# EAGLE board SparkFun_Temperature_Sensor-STTS22H-Panel (EAGLE 9.6.2), part 1 of 4
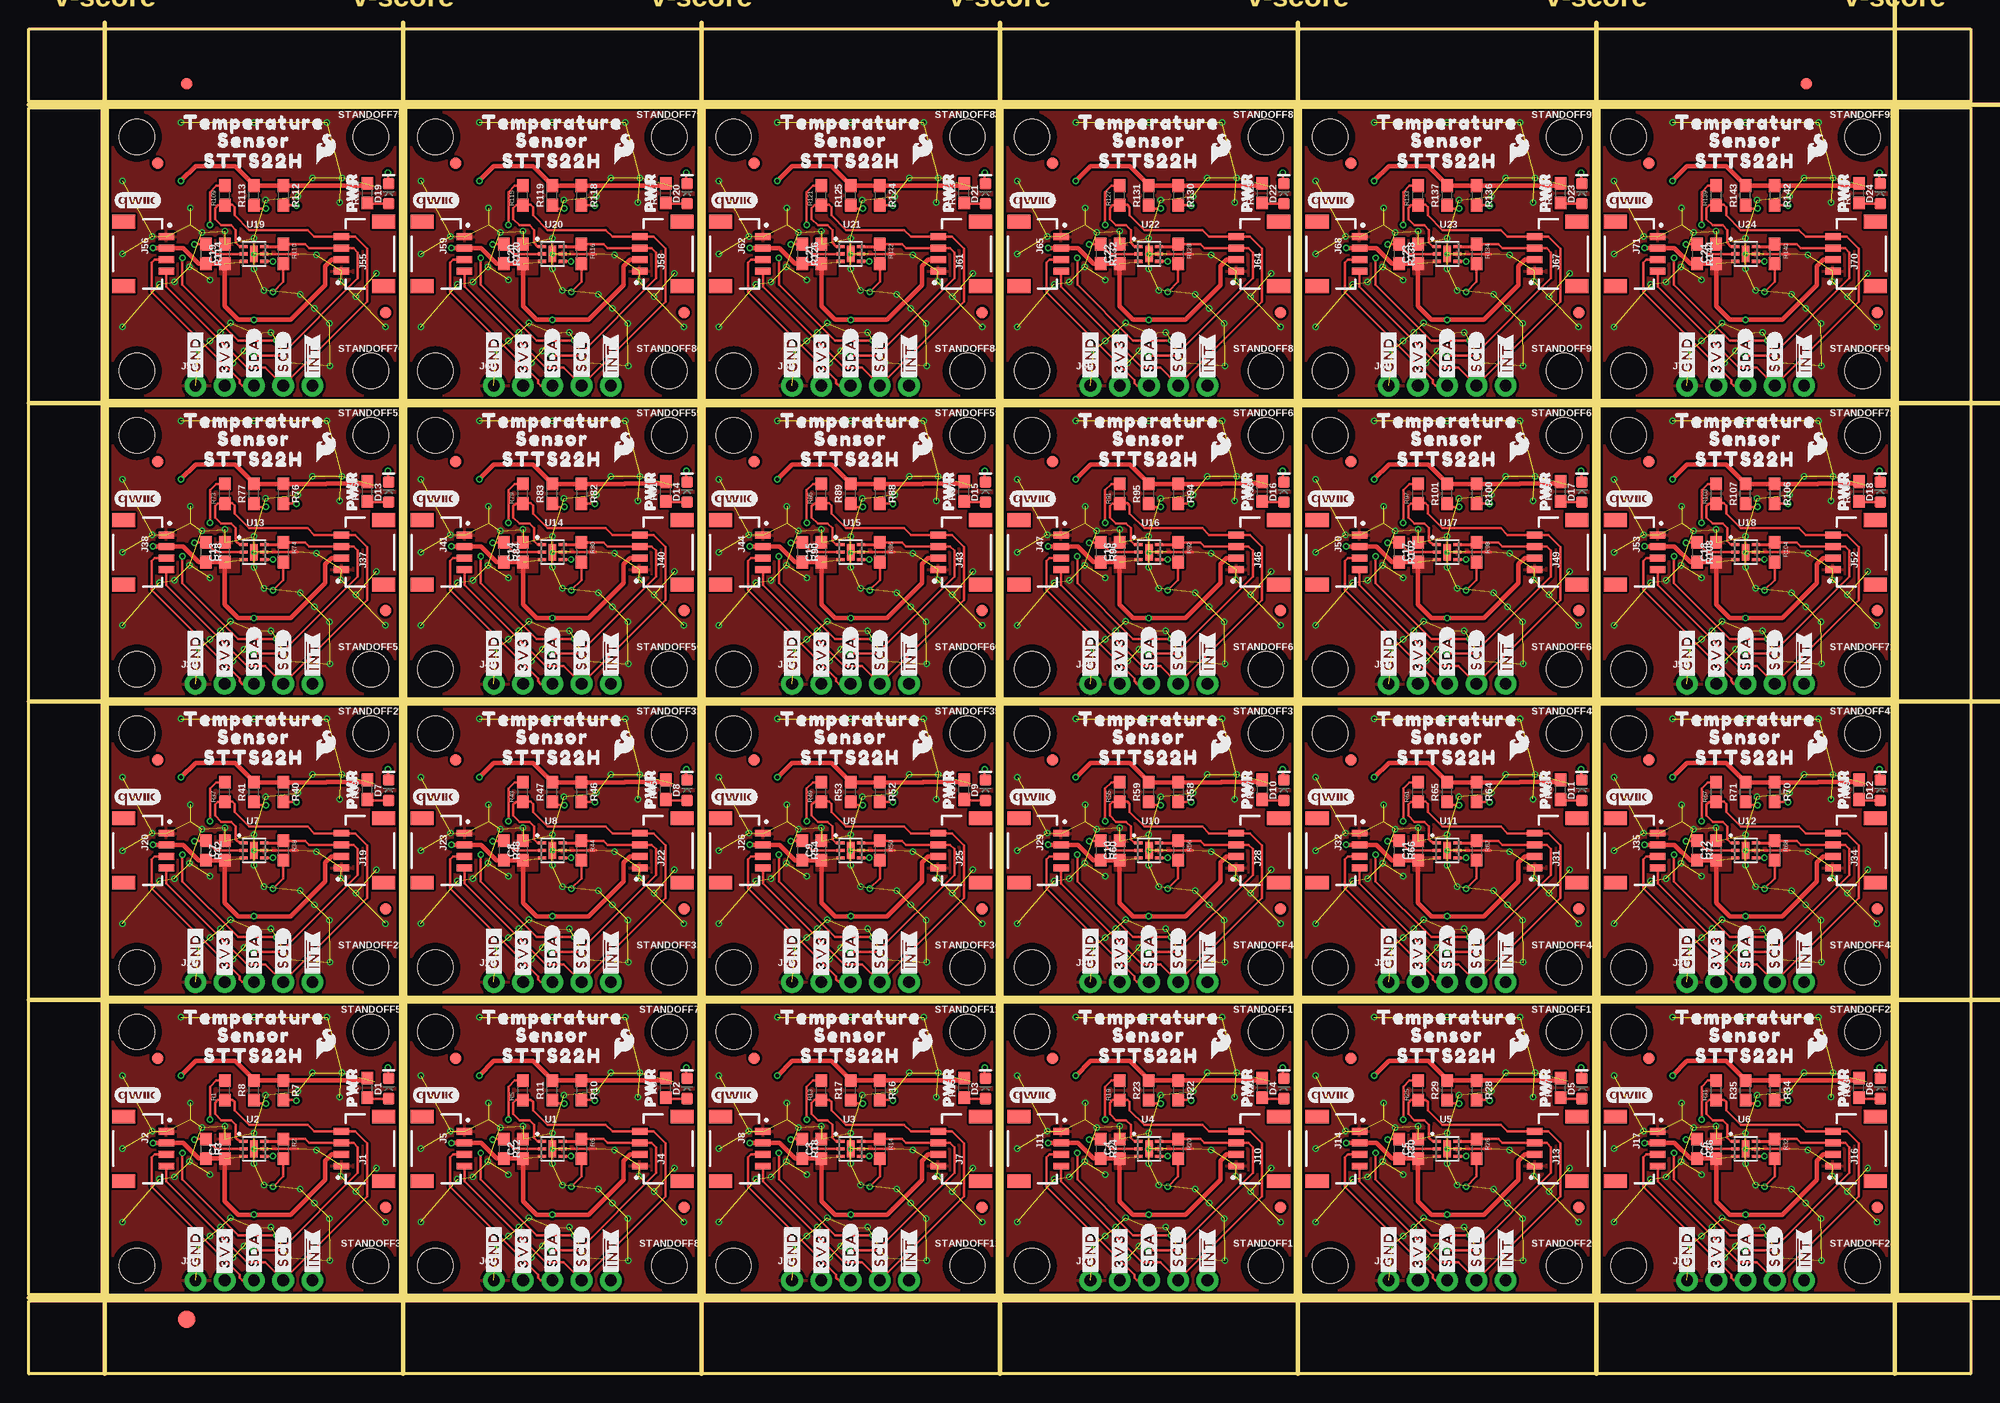
[diagram p0: board, top side]
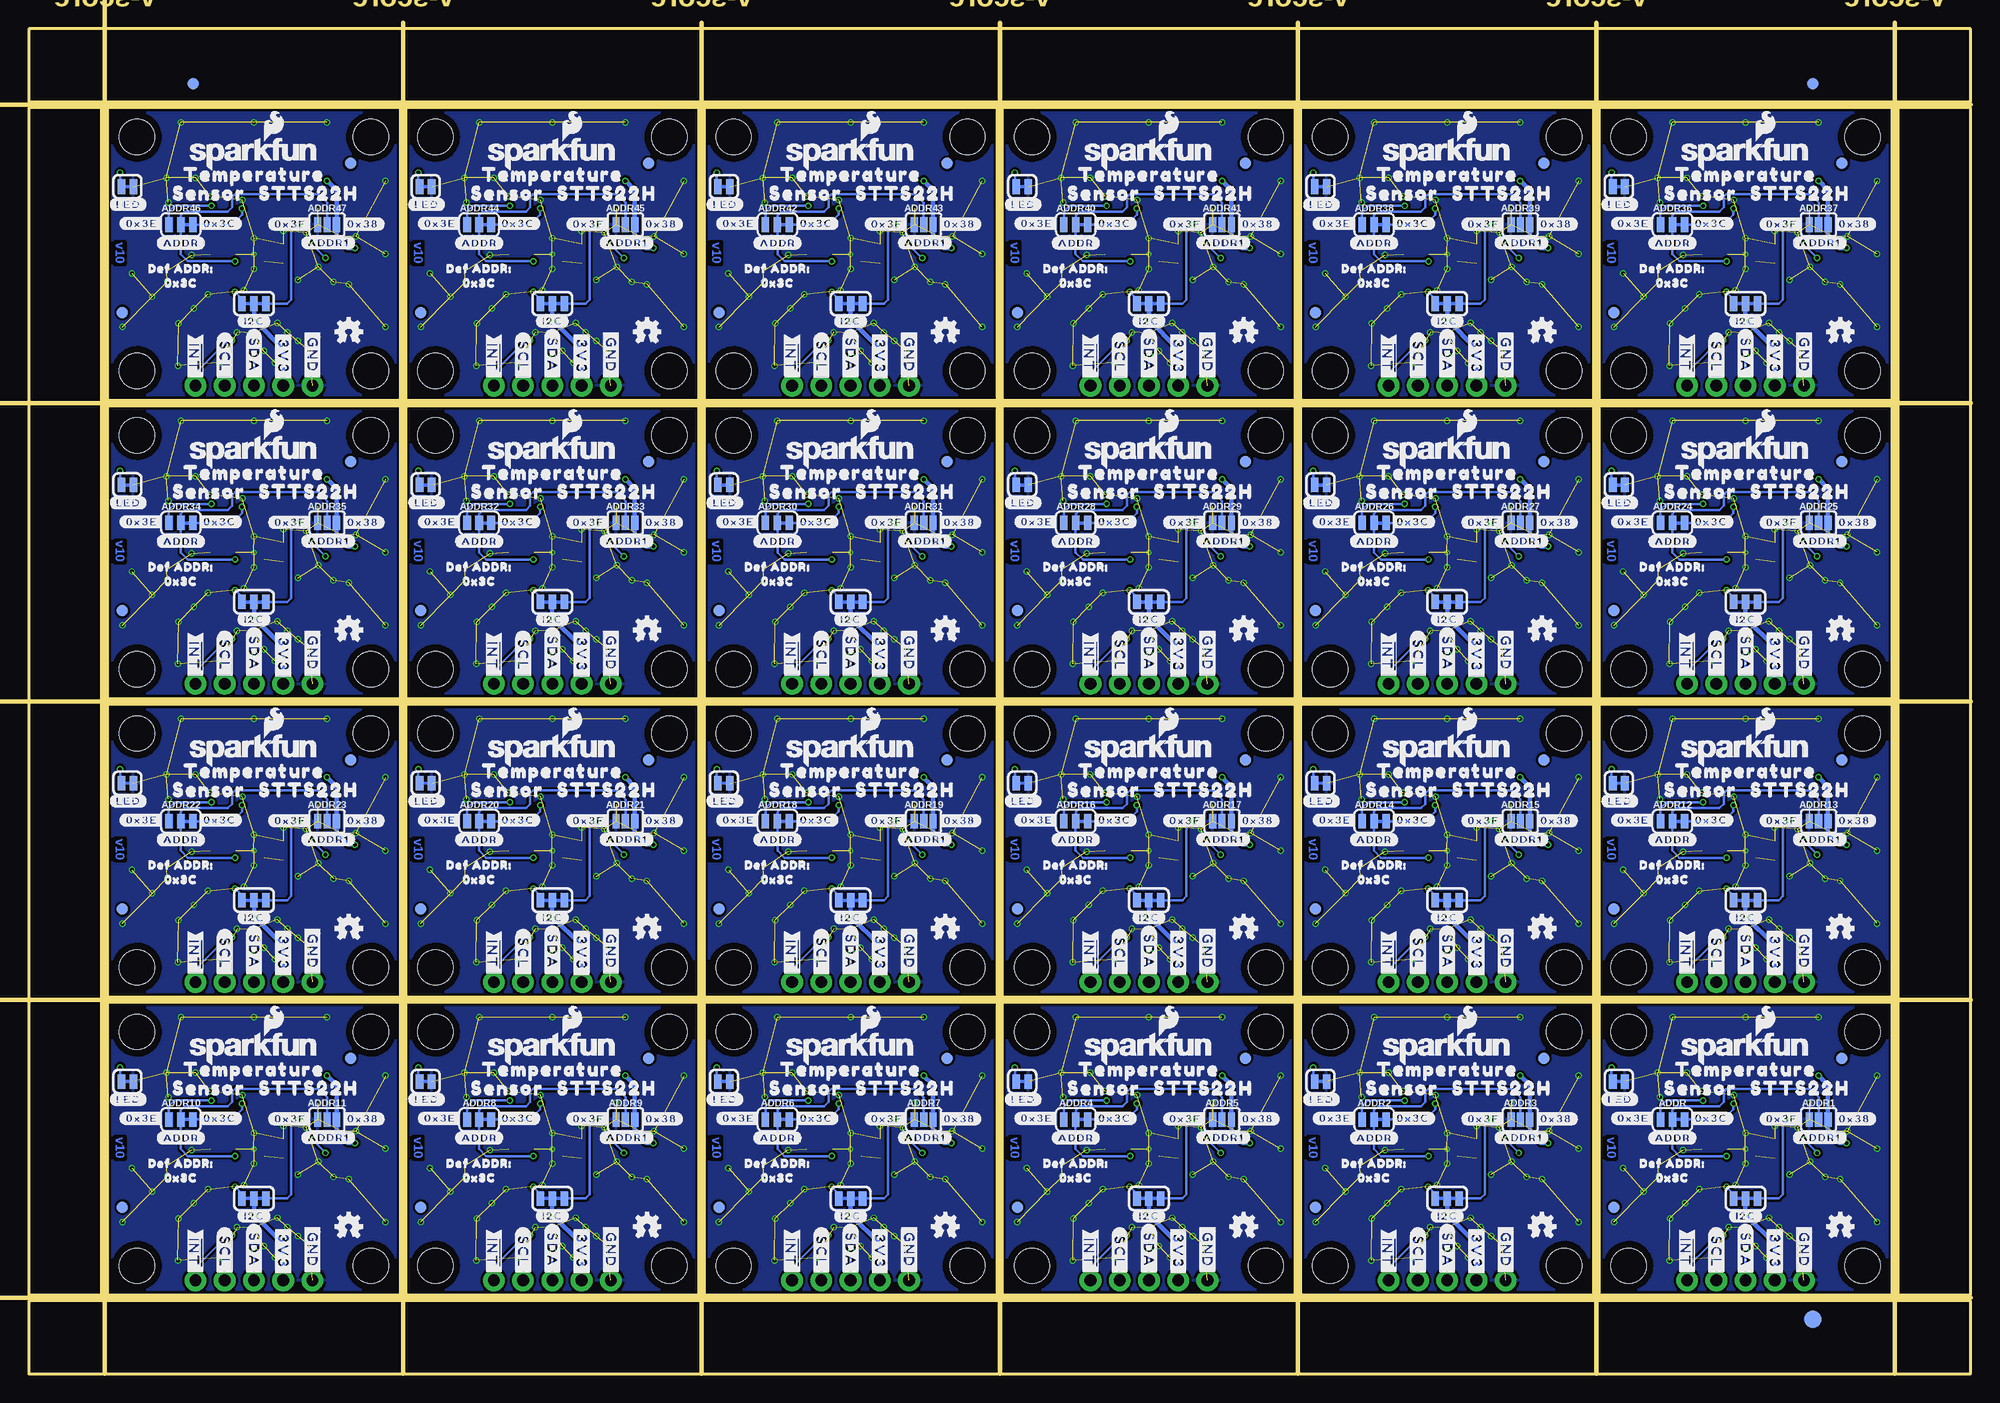
[diagram p1: board, bottom side, seen from below]

Size 168.66 x 116.84 mm. Coordinates in mm from the lower left corner, seen from the top.
Outline: 32.26,32.26 6.86,32.26 6.86,6.86 32.26,6.86 32.26,32.26
Outline: 58.17,32.26 32.77,32.26 32.77,6.86 58.17,6.86 58.17,32.26
Outline: 84.07,32.26 58.67,32.26 58.67,6.86 84.07,6.86 84.07,32.26
Outline: 109.98,32.26 84.58,32.26 84.58,6.86 109.98,6.86 109.98,32.26
Outline: 135.89,32.26 110.49,32.26 110.49,6.86 135.89,6.86 135.89,32.26
Outline: 161.8,32.26 136.4,32.26 136.4,6.86 161.8,6.86 161.8,32.26
Outline: 32.26,58.17 6.86,58.17 6.86,32.77 32.26,32.77 32.26,58.17
Outline: 58.17,58.17 32.77,58.17 32.77,32.77 58.17,32.77 58.17,58.17
Outline: 84.07,58.17 58.67,58.17 58.67,32.77 84.07,32.77 84.07,58.17
Outline: 109.98,58.17 84.58,58.17 84.58,32.77 109.98,32.77 109.98,58.17
Outline: 135.89,58.17 110.49,58.17 110.49,32.77 135.89,32.77 135.89,58.17
Outline: 161.8,58.17 136.4,58.17 136.4,32.77 161.8,32.77 161.8,58.17
Outline: 32.26,84.07 6.86,84.07 6.86,58.67 32.26,58.67 32.26,84.07
Outline: 58.17,84.07 32.77,84.07 32.77,58.67 58.17,58.67 58.17,84.07
Outline: 84.07,84.07 58.67,84.07 58.67,58.67 84.07,58.67 84.07,84.07
Outline: 109.98,84.07 84.58,84.07 84.58,58.67 109.98,58.67 109.98,84.07
Outline: 135.89,84.07 110.49,84.07 110.49,58.67 135.89,58.67 135.89,84.07
Outline: 161.8,84.07 136.4,84.07 136.4,58.67 161.8,58.67 161.8,84.07
Outline: 32.26,109.98 6.86,109.98 6.86,84.58 32.26,84.58 32.26,109.98
Outline: 58.17,109.98 32.77,109.98 32.77,84.58 58.17,84.58 58.17,109.98
Outline: 84.07,109.98 58.67,109.98 58.67,84.58 84.07,84.58 84.07,109.98
Outline: 109.98,109.98 84.58,109.98 84.58,84.58 109.98,84.58 109.98,109.98
Outline: 135.89,109.98 110.49,109.98 110.49,84.58 135.89,84.58 135.89,109.98
Outline: 161.8,109.98 136.4,109.98 136.4,84.58 161.8,84.58 161.8,109.98
Outline: 0,6.35 168.66,6.35 168.66,0 0,0 0,6.35
Outline: 162.31,109.98 168.66,109.98 168.66,6.86 162.31,6.86 162.31,109.98
Outline: 0,116.84 168.66,116.84 168.66,110.49 0,110.49 0,116.84
Outline: 0,109.98 6.35,109.98 6.35,6.86 0,6.86 0,109.98
Copper layers (1*16): Top 0.035mm / dielectric 1.5mm / Bottom 0.035mm
Design rules "SparkFun_Temperature_Sensor-STTS22H": minimum track width 5mil, minimum drill 0.3mm, track to track 5mil, track to pad 5mil, pad to pad 5mil, via to via 5mil, smd to smd 5mil, copper to edge 7mil, drill to drill 7mil, minimum pad ring 5mil, minimum via ring 5mil, stop-mask expansion 2.5mil, vias tented up to drill 25mil, thermal gap 10mil
Milling: 12 lines

## Footprints (pad centres in the part's own frame; a part is rotated, then mirrored left to right if it is on the bottom)
SMT-JUMPER_3_1-NC_TRACE_SILK = smd 0.66 x 1.27: 1 -1.041,0; 2 0,0; 3 1.041,0
SMT-JUMPER_3_NO_SILK = smd 0.635 x 1.27: 1 -0.813,0; 2 0,0; 3 0.813,0
0603 = smd 1.1 x 1: 1 -0.85,0; 2 0.85,0
LED-0603 = smd 1 x 1: A -0.877,0; C 0.877,0
FIDUCIAL-1X2 = smd 1 x 1: 1 0,0
FIDUCIAL-1.5X3 = smd 1.5 x 1.5: 1 0,0
SMT-JUMPER_3_2-NC_TRACE_SILK = smd 0.66 x 1.27: 1 -1.041,0; 2 0,0; 3 1.041,0
JST04_1MM_RA = smd 0.6 x 1.35: 1 -1.5,0; 2 -0.5,0; 3 0.5,0; 4 1.5,0 | smd 1.2 x 2: NC1 2.8,-3.675; NC2 -2.8,-3.675
1X05_NO_SILK = drill 1.016 pad 1.88: 1 0,0; 2 2.54,0; 3 5.08,0; 4 7.62,0; 5 10.16,0
SMT-JUMPER_2_NC_TRACE_SILK = smd 0.66 x 1.27: 1 -0.521,0; 2 0.521,0
STAND-OFF-TIGHT = hole 3.048: 0,0
UDFN-6L = smd 0.7 x 0.27: P1 -0.89,0.65; P2 -0.89,0; P3 -0.89,-0.65; P4 0.89,-0.65; P5 0.89,0; P6 0.89,0.65 | smd 0.65 x 1.45: P7 0.01,0

## Placement (x,y rotation side)
ADDR  JUMPER-SMT_3_1-NC_TRACE_SILK  [SMT-JUMPER_3_1-NC_TRACE_SILK]  25.91,22.1 0 bottom
ADDR1  JUMPER-SMT_3_NO_SILK  [SMT-JUMPER_3_NO_SILK]  13.21,22.1 0 bottom
ADDR2  JUMPER-SMT_3_1-NC_TRACE_SILK  [SMT-JUMPER_3_1-NC_TRACE_SILK]  51.82,22.1 0 bottom
ADDR3  JUMPER-SMT_3_NO_SILK  [SMT-JUMPER_3_NO_SILK]  39.12,22.1 0 bottom
ADDR4  JUMPER-SMT_3_1-NC_TRACE_SILK  [SMT-JUMPER_3_1-NC_TRACE_SILK]  77.72,22.1 0 bottom
ADDR5  JUMPER-SMT_3_NO_SILK  [SMT-JUMPER_3_NO_SILK]  65.02,22.1 0 bottom
ADDR6  JUMPER-SMT_3_1-NC_TRACE_SILK  [SMT-JUMPER_3_1-NC_TRACE_SILK]  103.63,22.1 0 bottom
ADDR7  JUMPER-SMT_3_NO_SILK  [SMT-JUMPER_3_NO_SILK]  90.93,22.1 0 bottom
ADDR8  JUMPER-SMT_3_1-NC_TRACE_SILK  [SMT-JUMPER_3_1-NC_TRACE_SILK]  129.54,22.1 0 bottom
ADDR9  JUMPER-SMT_3_NO_SILK  [SMT-JUMPER_3_NO_SILK]  116.84,22.1 0 bottom
ADDR10  JUMPER-SMT_3_1-NC_TRACE_SILK  [SMT-JUMPER_3_1-NC_TRACE_SILK]  155.45,22.1 0 bottom
ADDR11  JUMPER-SMT_3_NO_SILK  [SMT-JUMPER_3_NO_SILK]  142.75,22.1 0 bottom
ADDR12  JUMPER-SMT_3_1-NC_TRACE_SILK  [SMT-JUMPER_3_1-NC_TRACE_SILK]  25.91,48.01 0 bottom
ADDR13  JUMPER-SMT_3_NO_SILK  [SMT-JUMPER_3_NO_SILK]  13.21,48.01 0 bottom
ADDR14  JUMPER-SMT_3_1-NC_TRACE_SILK  [SMT-JUMPER_3_1-NC_TRACE_SILK]  51.82,48.01 0 bottom
ADDR15  JUMPER-SMT_3_NO_SILK  [SMT-JUMPER_3_NO_SILK]  39.12,48.01 0 bottom
ADDR16  JUMPER-SMT_3_1-NC_TRACE_SILK  [SMT-JUMPER_3_1-NC_TRACE_SILK]  77.72,48.01 0 bottom
ADDR17  JUMPER-SMT_3_NO_SILK  [SMT-JUMPER_3_NO_SILK]  65.02,48.01 0 bottom
ADDR18  JUMPER-SMT_3_1-NC_TRACE_SILK  [SMT-JUMPER_3_1-NC_TRACE_SILK]  103.63,48.01 0 bottom
ADDR19  JUMPER-SMT_3_NO_SILK  [SMT-JUMPER_3_NO_SILK]  90.93,48.01 0 bottom
ADDR20  JUMPER-SMT_3_1-NC_TRACE_SILK  [SMT-JUMPER_3_1-NC_TRACE_SILK]  129.54,48.01 0 bottom
ADDR21  JUMPER-SMT_3_NO_SILK  [SMT-JUMPER_3_NO_SILK]  116.84,48.01 0 bottom
ADDR22  JUMPER-SMT_3_1-NC_TRACE_SILK  [SMT-JUMPER_3_1-NC_TRACE_SILK]  155.45,48.01 0 bottom
ADDR23  JUMPER-SMT_3_NO_SILK  [SMT-JUMPER_3_NO_SILK]  142.75,48.01 0 bottom
ADDR24  JUMPER-SMT_3_1-NC_TRACE_SILK  [SMT-JUMPER_3_1-NC_TRACE_SILK]  25.91,73.91 0 bottom
ADDR25  JUMPER-SMT_3_NO_SILK  [SMT-JUMPER_3_NO_SILK]  13.21,73.91 0 bottom
ADDR26  JUMPER-SMT_3_1-NC_TRACE_SILK  [SMT-JUMPER_3_1-NC_TRACE_SILK]  51.82,73.91 0 bottom
ADDR27  JUMPER-SMT_3_NO_SILK  [SMT-JUMPER_3_NO_SILK]  39.12,73.91 0 bottom
ADDR28  JUMPER-SMT_3_1-NC_TRACE_SILK  [SMT-JUMPER_3_1-NC_TRACE_SILK]  77.72,73.91 0 bottom
ADDR29  JUMPER-SMT_3_NO_SILK  [SMT-JUMPER_3_NO_SILK]  65.02,73.91 0 bottom
ADDR30  JUMPER-SMT_3_1-NC_TRACE_SILK  [SMT-JUMPER_3_1-NC_TRACE_SILK]  103.63,73.91 0 bottom
ADDR31  JUMPER-SMT_3_NO_SILK  [SMT-JUMPER_3_NO_SILK]  90.93,73.91 0 bottom
ADDR32  JUMPER-SMT_3_1-NC_TRACE_SILK  [SMT-JUMPER_3_1-NC_TRACE_SILK]  129.54,73.91 0 bottom
ADDR33  JUMPER-SMT_3_NO_SILK  [SMT-JUMPER_3_NO_SILK]  116.84,73.91 0 bottom
ADDR34  JUMPER-SMT_3_1-NC_TRACE_SILK  [SMT-JUMPER_3_1-NC_TRACE_SILK]  155.45,73.91 0 bottom
ADDR35  JUMPER-SMT_3_NO_SILK  [SMT-JUMPER_3_NO_SILK]  142.75,73.91 0 bottom
ADDR36  JUMPER-SMT_3_1-NC_TRACE_SILK  [SMT-JUMPER_3_1-NC_TRACE_SILK]  25.91,99.82 0 bottom
ADDR37  JUMPER-SMT_3_NO_SILK  [SMT-JUMPER_3_NO_SILK]  13.21,99.82 0 bottom
ADDR38  JUMPER-SMT_3_1-NC_TRACE_SILK  [SMT-JUMPER_3_1-NC_TRACE_SILK]  51.82,99.82 0 bottom
ADDR39  JUMPER-SMT_3_NO_SILK  [SMT-JUMPER_3_NO_SILK]  39.12,99.82 0 bottom
ADDR40  JUMPER-SMT_3_1-NC_TRACE_SILK  [SMT-JUMPER_3_1-NC_TRACE_SILK]  77.72,99.82 0 bottom
ADDR41  JUMPER-SMT_3_NO_SILK  [SMT-JUMPER_3_NO_SILK]  65.02,99.82 0 bottom
ADDR42  JUMPER-SMT_3_1-NC_TRACE_SILK  [SMT-JUMPER_3_1-NC_TRACE_SILK]  103.63,99.82 0 bottom
ADDR43  JUMPER-SMT_3_NO_SILK  [SMT-JUMPER_3_NO_SILK]  90.93,99.82 0 bottom
ADDR44  JUMPER-SMT_3_1-NC_TRACE_SILK  [SMT-JUMPER_3_1-NC_TRACE_SILK]  129.54,99.82 0 bottom
ADDR45  JUMPER-SMT_3_NO_SILK  [SMT-JUMPER_3_NO_SILK]  116.84,99.82 0 bottom
ADDR46  JUMPER-SMT_3_1-NC_TRACE_SILK  [SMT-JUMPER_3_1-NC_TRACE_SILK]  155.45,99.82 0 bottom
ADDR47  JUMPER-SMT_3_NO_SILK  [SMT-JUMPER_3_NO_SILK]  142.75,99.82 0 bottom
C1  0.1uF  [0603]  17.02,19.56 90 top
C2  0.1uF  [0603]  42.93,19.56 90 top
C3  0.1uF  [0603]  68.83,19.56 90 top
C4  0.1uF  [0603]  94.74,19.56 90 top
C5  0.1uF  [0603]  120.65,19.56 90 top
C6  0.1uF  [0603]  146.56,19.56 90 top
C7  0.1uF  [0603]  17.02,45.47 90 top
C8  0.1uF  [0603]  42.93,45.47 90 top
C9  0.1uF  [0603]  68.83,45.47 90 top
C10  0.1uF  [0603]  94.74,45.47 90 top
C11  0.1uF  [0603]  120.65,45.47 90 top
C12  0.1uF  [0603]  146.56,45.47 90 top
C13  0.1uF  [0603]  17.02,71.37 90 top
C14  0.1uF  [0603]  42.93,71.37 90 top
C15  0.1uF  [0603]  68.83,71.37 90 top
C16  0.1uF  [0603]  94.74,71.37 90 top
C17  0.1uF  [0603]  120.65,71.37 90 top
C18  0.1uF  [0603]  146.56,71.37 90 top
C19  0.1uF  [0603]  17.02,97.28 90 top
C20  0.1uF  [0603]  42.93,97.28 90 top
C21  0.1uF  [0603]  68.83,97.28 90 top
C22  0.1uF  [0603]  94.74,97.28 90 top
C23  0.1uF  [0603]  120.65,97.28 90 top
C24  0.1uF  [0603]  146.56,97.28 90 top
D1  RED  [LED-0603]  31.27,24.79 90 top
D2  RED  [LED-0603]  57.18,24.79 90 top
D3  RED  [LED-0603]  83.08,24.79 90 top
D4  RED  [LED-0603]  108.99,24.79 90 top
D5  RED  [LED-0603]  134.9,24.79 90 top
D6  RED  [LED-0603]  160.81,24.79 90 top
D7  RED  [LED-0603]  31.27,50.7 90 top
D8  RED  [LED-0603]  57.18,50.7 90 top
D9  RED  [LED-0603]  83.08,50.7 90 top
D10  RED  [LED-0603]  108.99,50.7 90 top
D11  RED  [LED-0603]  134.9,50.7 90 top
D12  RED  [LED-0603]  160.81,50.7 90 top
D13  RED  [LED-0603]  31.27,76.61 90 top
D14  RED  [LED-0603]  57.18,76.61 90 top
D15  RED  [LED-0603]  83.08,76.61 90 top
D16  RED  [LED-0603]  108.99,76.61 90 top
D17  RED  [LED-0603]  134.9,76.61 90 top
D18  RED  [LED-0603]  160.81,76.61 90 top
D19  RED  [LED-0603]  31.27,102.51 90 top
D20  RED  [LED-0603]  57.18,102.51 90 top
D21  RED  [LED-0603]  83.08,102.51 90 top
D22  RED  [LED-0603]  108.99,102.51 90 top
D23  RED  [LED-0603]  134.9,102.51 90 top
D24  RED  [LED-0603]  160.81,102.51 90 top
E$1  [FIDUCIAL-1X2]  13.72,112.08 0 top
E$2  [FIDUCIAL-1X2]  13.72,112.08 0 bottom
E$3  [FIDUCIAL-1X2]  154.37,112.08 0 top
E$4  [FIDUCIAL-1X2]  154.37,112.08 0 bottom
E$5  [FIDUCIAL-1.5X3]  13.72,4.76 0 top
E$6  [FIDUCIAL-1.5X3]  13.72,4.76 0 bottom
FD1  FIDUCIAL1X2  [FIDUCIAL-1X2]  11.18,27.43 0 bottom
FD2  FIDUCIAL1X2  [FIDUCIAL-1X2]  30.99,14.48 0 bottom
FD3  FIDUCIAL1X2  [FIDUCIAL-1X2]  11.18,27.43 0 top
FD4  FIDUCIAL1X2  [FIDUCIAL-1X2]  30.99,14.48 0 top
FD5  FIDUCIAL1X2  [FIDUCIAL-1X2]  37.08,27.43 0 bottom
FD6  FIDUCIAL1X2  [FIDUCIAL-1X2]  56.9,14.48 0 bottom
FD7  FIDUCIAL1X2  [FIDUCIAL-1X2]  37.08,27.43 0 top
FD8  FIDUCIAL1X2  [FIDUCIAL-1X2]  56.9,14.48 0 top
FD9  FIDUCIAL1X2  [FIDUCIAL-1X2]  62.99,27.43 0 bottom
FD10  FIDUCIAL1X2  [FIDUCIAL-1X2]  82.8,14.48 0 bottom
FD11  FIDUCIAL1X2  [FIDUCIAL-1X2]  62.99,27.43 0 top
FD12  FIDUCIAL1X2  [FIDUCIAL-1X2]  82.8,14.48 0 top
FD13  FIDUCIAL1X2  [FIDUCIAL-1X2]  88.9,27.43 0 bottom
FD14  FIDUCIAL1X2  [FIDUCIAL-1X2]  108.71,14.48 0 bottom
FD15  FIDUCIAL1X2  [FIDUCIAL-1X2]  88.9,27.43 0 top
FD16  FIDUCIAL1X2  [FIDUCIAL-1X2]  108.71,14.48 0 top
FD17  FIDUCIAL1X2  [FIDUCIAL-1X2]  114.81,27.43 0 bottom
FD18  FIDUCIAL1X2  [FIDUCIAL-1X2]  134.62,14.48 0 bottom
FD19  FIDUCIAL1X2  [FIDUCIAL-1X2]  114.81,27.43 0 top
FD20  FIDUCIAL1X2  [FIDUCIAL-1X2]  134.62,14.48 0 top
FD21  FIDUCIAL1X2  [FIDUCIAL-1X2]  140.72,27.43 0 bottom
FD22  FIDUCIAL1X2  [FIDUCIAL-1X2]  160.53,14.48 0 bottom
FD23  FIDUCIAL1X2  [FIDUCIAL-1X2]  140.72,27.43 0 top
FD24  FIDUCIAL1X2  [FIDUCIAL-1X2]  160.53,14.48 0 top
FD25  FIDUCIAL1X2  [FIDUCIAL-1X2]  11.18,53.34 0 bottom
FD26  FIDUCIAL1X2  [FIDUCIAL-1X2]  30.99,40.39 0 bottom
FD27  FIDUCIAL1X2  [FIDUCIAL-1X2]  11.18,53.34 0 top
FD28  FIDUCIAL1X2  [FIDUCIAL-1X2]  30.99,40.39 0 top
FD29  FIDUCIAL1X2  [FIDUCIAL-1X2]  37.08,53.34 0 bottom
FD30  FIDUCIAL1X2  [FIDUCIAL-1X2]  56.9,40.39 0 bottom
FD31  FIDUCIAL1X2  [FIDUCIAL-1X2]  37.08,53.34 0 top
FD32  FIDUCIAL1X2  [FIDUCIAL-1X2]  56.9,40.39 0 top
FD33  FIDUCIAL1X2  [FIDUCIAL-1X2]  62.99,53.34 0 bottom
FD34  FIDUCIAL1X2  [FIDUCIAL-1X2]  82.8,40.39 0 bottom
FD35  FIDUCIAL1X2  [FIDUCIAL-1X2]  62.99,53.34 0 top
FD36  FIDUCIAL1X2  [FIDUCIAL-1X2]  82.8,40.39 0 top
FD37  FIDUCIAL1X2  [FIDUCIAL-1X2]  88.9,53.34 0 bottom
FD38  FIDUCIAL1X2  [FIDUCIAL-1X2]  108.71,40.39 0 bottom
FD39  FIDUCIAL1X2  [FIDUCIAL-1X2]  88.9,53.34 0 top
FD40  FIDUCIAL1X2  [FIDUCIAL-1X2]  108.71,40.39 0 top
FD41  FIDUCIAL1X2  [FIDUCIAL-1X2]  114.81,53.34 0 bottom
FD42  FIDUCIAL1X2  [FIDUCIAL-1X2]  134.62,40.39 0 bottom
FD43  FIDUCIAL1X2  [FIDUCIAL-1X2]  114.81,53.34 0 top
FD44  FIDUCIAL1X2  [FIDUCIAL-1X2]  134.62,40.39 0 top
FD45  FIDUCIAL1X2  [FIDUCIAL-1X2]  140.72,53.34 0 bottom
FD46  FIDUCIAL1X2  [FIDUCIAL-1X2]  160.53,40.39 0 bottom
FD47  FIDUCIAL1X2  [FIDUCIAL-1X2]  140.72,53.34 0 top
FD48  FIDUCIAL1X2  [FIDUCIAL-1X2]  160.53,40.39 0 top
FD49  FIDUCIAL1X2  [FIDUCIAL-1X2]  11.18,79.25 0 bottom
FD50  FIDUCIAL1X2  [FIDUCIAL-1X2]  30.99,66.29 0 bottom
FD51  FIDUCIAL1X2  [FIDUCIAL-1X2]  11.18,79.25 0 top
FD52  FIDUCIAL1X2  [FIDUCIAL-1X2]  30.99,66.29 0 top
FD53  FIDUCIAL1X2  [FIDUCIAL-1X2]  37.08,79.25 0 bottom
FD54  FIDUCIAL1X2  [FIDUCIAL-1X2]  56.9,66.29 0 bottom
FD55  FIDUCIAL1X2  [FIDUCIAL-1X2]  37.08,79.25 0 top
FD56  FIDUCIAL1X2  [FIDUCIAL-1X2]  56.9,66.29 0 top
FD57  FIDUCIAL1X2  [FIDUCIAL-1X2]  62.99,79.25 0 bottom
FD58  FIDUCIAL1X2  [FIDUCIAL-1X2]  82.8,66.29 0 bottom
FD59  FIDUCIAL1X2  [FIDUCIAL-1X2]  62.99,79.25 0 top
FD60  FIDUCIAL1X2  [FIDUCIAL-1X2]  82.8,66.29 0 top
FD61  FIDUCIAL1X2  [FIDUCIAL-1X2]  88.9,79.25 0 bottom
FD62  FIDUCIAL1X2  [FIDUCIAL-1X2]  108.71,66.29 0 bottom
FD63  FIDUCIAL1X2  [FIDUCIAL-1X2]  88.9,79.25 0 top
FD64  FIDUCIAL1X2  [FIDUCIAL-1X2]  108.71,66.29 0 top
FD65  FIDUCIAL1X2  [FIDUCIAL-1X2]  114.81,79.25 0 bottom
FD66  FIDUCIAL1X2  [FIDUCIAL-1X2]  134.62,66.29 0 bottom
FD67  FIDUCIAL1X2  [FIDUCIAL-1X2]  114.81,79.25 0 top
FD68  FIDUCIAL1X2  [FIDUCIAL-1X2]  134.62,66.29 0 top
FD69  FIDUCIAL1X2  [FIDUCIAL-1X2]  140.72,79.25 0 bottom
FD70  FIDUCIAL1X2  [FIDUCIAL-1X2]  160.53,66.29 0 bottom
FD71  FIDUCIAL1X2  [FIDUCIAL-1X2]  140.72,79.25 0 top
FD72  FIDUCIAL1X2  [FIDUCIAL-1X2]  160.53,66.29 0 top
FD73  FIDUCIAL1X2  [FIDUCIAL-1X2]  11.18,105.16 0 bottom
FD74  FIDUCIAL1X2  [FIDUCIAL-1X2]  30.99,92.2 0 bottom
FD75  FIDUCIAL1X2  [FIDUCIAL-1X2]  11.18,105.16 0 top
FD76  FIDUCIAL1X2  [FIDUCIAL-1X2]  30.99,92.2 0 top
FD77  FIDUCIAL1X2  [FIDUCIAL-1X2]  37.08,105.16 0 bottom
FD78  FIDUCIAL1X2  [FIDUCIAL-1X2]  56.9,92.2 0 bottom
FD79  FIDUCIAL1X2  [FIDUCIAL-1X2]  37.08,105.16 0 top
FD80  FIDUCIAL1X2  [FIDUCIAL-1X2]  56.9,92.2 0 top
FD81  FIDUCIAL1X2  [FIDUCIAL-1X2]  62.99,105.16 0 bottom
FD82  FIDUCIAL1X2  [FIDUCIAL-1X2]  82.8,92.2 0 bottom
FD83  FIDUCIAL1X2  [FIDUCIAL-1X2]  62.99,105.16 0 top
FD84  FIDUCIAL1X2  [FIDUCIAL-1X2]  82.8,92.2 0 top
FD85  FIDUCIAL1X2  [FIDUCIAL-1X2]  88.9,105.16 0 bottom
FD86  FIDUCIAL1X2  [FIDUCIAL-1X2]  108.71,92.2 0 bottom
FD87  FIDUCIAL1X2  [FIDUCIAL-1X2]  88.9,105.16 0 top
FD88  FIDUCIAL1X2  [FIDUCIAL-1X2]  108.71,92.2 0 top
FD89  FIDUCIAL1X2  [FIDUCIAL-1X2]  114.81,105.16 0 bottom
FD90  FIDUCIAL1X2  [FIDUCIAL-1X2]  134.62,92.2 0 bottom
FD91  FIDUCIAL1X2  [FIDUCIAL-1X2]  114.81,105.16 0 top
FD92  FIDUCIAL1X2  [FIDUCIAL-1X2]  134.62,92.2 0 top
FD93  FIDUCIAL1X2  [FIDUCIAL-1X2]  140.72,105.16 0 bottom
FD94  FIDUCIAL1X2  [FIDUCIAL-1X2]  160.53,92.2 0 bottom
FD95  FIDUCIAL1X2  [FIDUCIAL-1X2]  140.72,105.16 0 top
FD96  FIDUCIAL1X2  [FIDUCIAL-1X2]  160.53,92.2 0 top
I2C_PU  S_MODE  [SMT-JUMPER_3_2-NC_TRACE_SILK]  19.56,15.24 180 bottom
I2C_PU1  S_MODE  [SMT-JUMPER_3_2-NC_TRACE_SILK]  45.47,15.24 180 bottom
I2C_PU2  S_MODE  [SMT-JUMPER_3_2-NC_TRACE_SILK]  71.37,15.24 180 bottom
I2C_PU3  S_MODE  [SMT-JUMPER_3_2-NC_TRACE_SILK]  97.28,15.24 180 bottom
I2C_PU4  S_MODE  [SMT-JUMPER_3_2-NC_TRACE_SILK]  123.19,15.24 180 bottom
I2C_PU5  S_MODE  [SMT-JUMPER_3_2-NC_TRACE_SILK]  149.1,15.24 180 bottom
I2C_PU6  S_MODE  [SMT-JUMPER_3_2-NC_TRACE_SILK]  19.56,41.15 180 bottom
I2C_PU7  S_MODE  [SMT-JUMPER_3_2-NC_TRACE_SILK]  45.47,41.15 180 bottom
I2C_PU8  S_MODE  [SMT-JUMPER_3_2-NC_TRACE_SILK]  71.37,41.15 180 bottom
I2C_PU9  S_MODE  [SMT-JUMPER_3_2-NC_TRACE_SILK]  97.28,41.15 180 bottom
I2C_PU10  S_MODE  [SMT-JUMPER_3_2-NC_TRACE_SILK]  123.19,41.15 180 bottom
I2C_PU11  S_MODE  [SMT-JUMPER_3_2-NC_TRACE_SILK]  149.1,41.15 180 bottom
I2C_PU12  S_MODE  [SMT-JUMPER_3_2-NC_TRACE_SILK]  19.56,67.06 180 bottom
I2C_PU13  S_MODE  [SMT-JUMPER_3_2-NC_TRACE_SILK]  45.47,67.06 180 bottom
I2C_PU14  S_MODE  [SMT-JUMPER_3_2-NC_TRACE_SILK]  71.37,67.06 180 bottom
I2C_PU15  S_MODE  [SMT-JUMPER_3_2-NC_TRACE_SILK]  97.28,67.06 180 bottom
I2C_PU16  S_MODE  [SMT-JUMPER_3_2-NC_TRACE_SILK]  123.19,67.06 180 bottom
I2C_PU17  S_MODE  [SMT-JUMPER_3_2-NC_TRACE_SILK]  149.1,67.06 180 bottom
I2C_PU18  S_MODE  [SMT-JUMPER_3_2-NC_TRACE_SILK]  19.56,92.96 180 bottom
I2C_PU19  S_MODE  [SMT-JUMPER_3_2-NC_TRACE_SILK]  45.47,92.96 180 bottom
I2C_PU20  S_MODE  [SMT-JUMPER_3_2-NC_TRACE_SILK]  71.37,92.96 180 bottom
I2C_PU21  S_MODE  [SMT-JUMPER_3_2-NC_TRACE_SILK]  97.28,92.96 180 bottom
I2C_PU22  S_MODE  [SMT-JUMPER_3_2-NC_TRACE_SILK]  123.19,92.96 180 bottom
I2C_PU23  S_MODE  [SMT-JUMPER_3_2-NC_TRACE_SILK]  149.1,92.96 180 bottom
J1  QWIIC_RIGHT_ANGLE  [JST04_1MM_RA]  27.15,19.56 90 top
J2  QWIIC_RIGHT_ANGLE  [JST04_1MM_RA]  11.94,19.56 270 top
J3  [1X05_NO_SILK]  14.48,8.13 0 top
J4  QWIIC_RIGHT_ANGLE  [JST04_1MM_RA]  53.06,19.56 90 top
J5  QWIIC_RIGHT_ANGLE  [JST04_1MM_RA]  37.85,19.56 270 top
J6  [1X05_NO_SILK]  40.39,8.13 0 top
J7  QWIIC_RIGHT_ANGLE  [JST04_1MM_RA]  78.97,19.56 90 top
J8  QWIIC_RIGHT_ANGLE  [JST04_1MM_RA]  63.75,19.56 270 top
J9  [1X05_NO_SILK]  66.29,8.13 0 top
J10  QWIIC_RIGHT_ANGLE  [JST04_1MM_RA]  104.88,19.56 90 top
J11  QWIIC_RIGHT_ANGLE  [JST04_1MM_RA]  89.66,19.56 270 top
J12  [1X05_NO_SILK]  92.2,8.13 0 top
J13  QWIIC_RIGHT_ANGLE  [JST04_1MM_RA]  130.78,19.56 90 top
J14  QWIIC_RIGHT_ANGLE  [JST04_1MM_RA]  115.57,19.56 270 top
J15  [1X05_NO_SILK]  118.11,8.13 0 top
J16  QWIIC_RIGHT_ANGLE  [JST04_1MM_RA]  156.69,19.56 90 top
J17  QWIIC_RIGHT_ANGLE  [JST04_1MM_RA]  141.48,19.56 270 top
J18  [1X05_NO_SILK]  144.02,8.13 0 top
J19  QWIIC_RIGHT_ANGLE  [JST04_1MM_RA]  27.15,45.47 90 top
J20  QWIIC_RIGHT_ANGLE  [JST04_1MM_RA]  11.94,45.47 270 top
J21  [1X05_NO_SILK]  14.48,34.04 0 top
J22  QWIIC_RIGHT_ANGLE  [JST04_1MM_RA]  53.06,45.47 90 top
J23  QWIIC_RIGHT_ANGLE  [JST04_1MM_RA]  37.85,45.47 270 top
J24  [1X05_NO_SILK]  40.39,34.04 0 top
J25  QWIIC_RIGHT_ANGLE  [JST04_1MM_RA]  78.97,45.47 90 top
J26  QWIIC_RIGHT_ANGLE  [JST04_1MM_RA]  63.75,45.47 270 top
J27  [1X05_NO_SILK]  66.29,34.04 0 top
J28  QWIIC_RIGHT_ANGLE  [JST04_1MM_RA]  104.88,45.47 90 top
J29  QWIIC_RIGHT_ANGLE  [JST04_1MM_RA]  89.66,45.47 270 top
J30  [1X05_NO_SILK]  92.2,34.04 0 top
J31  QWIIC_RIGHT_ANGLE  [JST04_1MM_RA]  130.78,45.47 90 top
J32  QWIIC_RIGHT_ANGLE  [JST04_1MM_RA]  115.57,45.47 270 top
J33  [1X05_NO_SILK]  118.11,34.04 0 top
J34  QWIIC_RIGHT_ANGLE  [JST04_1MM_RA]  156.69,45.47 90 top
J35  QWIIC_RIGHT_ANGLE  [JST04_1MM_RA]  141.48,45.47 270 top
J36  [1X05_NO_SILK]  144.02,34.04 0 top
J37  QWIIC_RIGHT_ANGLE  [JST04_1MM_RA]  27.15,71.37 90 top
J38  QWIIC_RIGHT_ANGLE  [JST04_1MM_RA]  11.94,71.37 270 top
J39  [1X05_NO_SILK]  14.48,59.94 0 top
J40  QWIIC_RIGHT_ANGLE  [JST04_1MM_RA]  53.06,71.37 90 top
J41  QWIIC_RIGHT_ANGLE  [JST04_1MM_RA]  37.85,71.37 270 top
J42  [1X05_NO_SILK]  40.39,59.94 0 top
J43  QWIIC_RIGHT_ANGLE  [JST04_1MM_RA]  78.97,71.37 90 top
J44  QWIIC_RIGHT_ANGLE  [JST04_1MM_RA]  63.75,71.37 270 top
J45  [1X05_NO_SILK]  66.29,59.94 0 top
J46  QWIIC_RIGHT_ANGLE  [JST04_1MM_RA]  104.88,71.37 90 top
J47  QWIIC_RIGHT_ANGLE  [JST04_1MM_RA]  89.66,71.37 270 top
J48  [1X05_NO_SILK]  92.2,59.94 0 top
J49  QWIIC_RIGHT_ANGLE  [JST04_1MM_RA]  130.78,71.37 90 top
J50  QWIIC_RIGHT_ANGLE  [JST04_1MM_RA]  115.57,71.37 270 top
J51  [1X05_NO_SILK]  118.11,59.94 0 top
J52  QWIIC_RIGHT_ANGLE  [JST04_1MM_RA]  156.69,71.37 90 top
J53  QWIIC_RIGHT_ANGLE  [JST04_1MM_RA]  141.48,71.37 270 top
J54  [1X05_NO_SILK]  144.02,59.94 0 top
J55  QWIIC_RIGHT_ANGLE  [JST04_1MM_RA]  27.15,97.28 90 top
J56  QWIIC_RIGHT_ANGLE  [JST04_1MM_RA]  11.94,97.28 270 top
J57  [1X05_NO_SILK]  14.48,85.85 0 top
J58  QWIIC_RIGHT_ANGLE  [JST04_1MM_RA]  53.06,97.28 90 top
J59  QWIIC_RIGHT_ANGLE  [JST04_1MM_RA]  37.85,97.28 270 top
J60  [1X05_NO_SILK]  40.39,85.85 0 top
J61  QWIIC_RIGHT_ANGLE  [JST04_1MM_RA]  78.97,97.28 90 top
J62  QWIIC_RIGHT_ANGLE  [JST04_1MM_RA]  63.75,97.28 270 top
J63  [1X05_NO_SILK]  66.29,85.85 0 top
J64  QWIIC_RIGHT_ANGLE  [JST04_1MM_RA]  104.88,97.28 90 top
J65  QWIIC_RIGHT_ANGLE  [JST04_1MM_RA]  89.66,97.28 270 top
J66  [1X05_NO_SILK]  92.2,85.85 0 top
J67  QWIIC_RIGHT_ANGLE  [JST04_1MM_RA]  130.78,97.28 90 top
J68  QWIIC_RIGHT_ANGLE  [JST04_1MM_RA]  115.57,97.28 270 top
J69  [1X05_NO_SILK]  118.11,85.85 0 top
J70  QWIIC_RIGHT_ANGLE  [JST04_1MM_RA]  156.69,97.28 90 top
J71  QWIIC_RIGHT_ANGLE  [JST04_1MM_RA]  141.48,97.28 270 top
J72  [1X05_NO_SILK]  144.02,85.85 0 top
LED  JUMPER-SMT_2_NC_TRACE_SILK  [SMT-JUMPER_2_NC_TRACE_SILK]  30.56,25.4 180 bottom
LED1  JUMPER-SMT_2_NC_TRACE_SILK  [SMT-JUMPER_2_NC_TRACE_SILK]  56.46,25.4 180 bottom
LED2  JUMPER-SMT_2_NC_TRACE_SILK  [SMT-JUMPER_2_NC_TRACE_SILK]  82.37,25.4 180 bottom
LED3  JUMPER-SMT_2_NC_TRACE_SILK  [SMT-JUMPER_2_NC_TRACE_SILK]  108.28,25.4 180 bottom
LED4  JUMPER-SMT_2_NC_TRACE_SILK  [SMT-JUMPER_2_NC_TRACE_SILK]  134.19,25.4 180 bottom
LED5  JUMPER-SMT_2_NC_TRACE_SILK  [SMT-JUMPER_2_NC_TRACE_SILK]  160.1,25.4 180 bottom
LED6  JUMPER-SMT_2_NC_TRACE_SILK  [SMT-JUMPER_2_NC_TRACE_SILK]  30.56,51.31 180 bottom
LED7  JUMPER-SMT_2_NC_TRACE_SILK  [SMT-JUMPER_2_NC_TRACE_SILK]  56.46,51.31 180 bottom
LED8  JUMPER-SMT_2_NC_TRACE_SILK  [SMT-JUMPER_2_NC_TRACE_SILK]  82.37,51.31 180 bottom
LED9  JUMPER-SMT_2_NC_TRACE_SILK  [SMT-JUMPER_2_NC_TRACE_SILK]  108.28,51.31 180 bottom
LED10  JUMPER-SMT_2_NC_TRACE_SILK  [SMT-JUMPER_2_NC_TRACE_SILK]  134.19,51.31 180 bottom
LED11  JUMPER-SMT_2_NC_TRACE_SILK  [SMT-JUMPER_2_NC_TRACE_SILK]  160.1,51.31 180 bottom
LED12  JUMPER-SMT_2_NC_TRACE_SILK  [SMT-JUMPER_2_NC_TRACE_SILK]  30.56,77.22 180 bottom
LED13  JUMPER-SMT_2_NC_TRACE_SILK  [SMT-JUMPER_2_NC_TRACE_SILK]  56.46,77.22 180 bottom
LED14  JUMPER-SMT_2_NC_TRACE_SILK  [SMT-JUMPER_2_NC_TRACE_SILK]  82.37,77.22 180 bottom
LED15  JUMPER-SMT_2_NC_TRACE_SILK  [SMT-JUMPER_2_NC_TRACE_SILK]  108.28,77.22 180 bottom
LED16  JUMPER-SMT_2_NC_TRACE_SILK  [SMT-JUMPER_2_NC_TRACE_SILK]  134.19,77.22 180 bottom
LED17  JUMPER-SMT_2_NC_TRACE_SILK  [SMT-JUMPER_2_NC_TRACE_SILK]  160.1,77.22 180 bottom
LED18  JUMPER-SMT_2_NC_TRACE_SILK  [SMT-JUMPER_2_NC_TRACE_SILK]  30.56,103.12 180 bottom
LED19  JUMPER-SMT_2_NC_TRACE_SILK  [SMT-JUMPER_2_NC_TRACE_SILK]  56.46,103.12 180 bottom
LED20  JUMPER-SMT_2_NC_TRACE_SILK  [SMT-JUMPER_2_NC_TRACE_SILK]  82.37,103.12 180 bottom
LED21  JUMPER-SMT_2_NC_TRACE_SILK  [SMT-JUMPER_2_NC_TRACE_SILK]  108.28,103.12 180 bottom
LED22  JUMPER-SMT_2_NC_TRACE_SILK  [SMT-JUMPER_2_NC_TRACE_SILK]  134.19,103.12 180 bottom
LED23  JUMPER-SMT_2_NC_TRACE_SILK  [SMT-JUMPER_2_NC_TRACE_SILK]  160.1,103.12 180 bottom
LOGO1  OSHW-LOGOMINI  [OSHW-LOGO-MINI]  37.24,12.81 0 bottom
LOGO2  OSHW-LOGOMINI  [OSHW-LOGO-MINI]  11.33,12.81 0 bottom
LOGO3  SFE_LOGO_NAME_FLAME.1_INCH  [SFE_LOGO_NAME_FLAME_.1]  19.56,28.27 0 bottom
LOGO4  QWIIC_LOGO_4MM  [QWIIC_4MM]  9.47,24.21 0 top
LOGO5  SFE_LOGO_NAME_FLAME.1_INCH  [SFE_LOGO_NAME_FLAME_.1]  45.47,28.27 0 bottom
LOGO6  QWIIC_LOGO_4MM  [QWIIC_4MM]  35.38,24.21 0 top
LOGO7  OSHW-LOGOMINI  [OSHW-LOGO-MINI]  63.14,12.81 0 bottom
LOGO8  SFE_LOGO_NAME_FLAME.1_INCH  [SFE_LOGO_NAME_FLAME_.1]  71.37,28.27 0 bottom
LOGO9  QWIIC_LOGO_4MM  [QWIIC_4MM]  61.29,24.21 0 top
LOGO10  OSHW-LOGOMINI  [OSHW-LOGO-MINI]  89.05,12.81 0 bottom
LOGO11  SFE_LOGO_NAME_FLAME.1_INCH  [SFE_LOGO_NAME_FLAME_.1]  97.28,28.27 0 bottom
LOGO12  QWIIC_LOGO_4MM  [QWIIC_4MM]  87.2,24.21 0 top
LOGO13  OSHW-LOGOMINI  [OSHW-LOGO-MINI]  114.96,12.81 0 bottom
LOGO14  SFE_LOGO_NAME_FLAME.1_INCH  [SFE_LOGO_NAME_FLAME_.1]  123.19,28.27 0 bottom
LOGO15  QWIIC_LOGO_4MM  [QWIIC_4MM]  113.11,24.21 0 top
LOGO16  OSHW-LOGOMINI  [OSHW-LOGO-MINI]  140.87,12.81 0 bottom
LOGO17  SFE_LOGO_NAME_FLAME.1_INCH  [SFE_LOGO_NAME_FLAME_.1]  149.1,28.27 0 bottom
LOGO18  QWIIC_LOGO_4MM  [QWIIC_4MM]  139.01,24.21 0 top
LOGO19  OSHW-LOGOMINI  [OSHW-LOGO-MINI]  11.33,38.72 0 bottom
LOGO20  SFE_LOGO_NAME_FLAME.1_INCH  [SFE_LOGO_NAME_FLAME_.1]  19.56,54.18 0 bottom
LOGO21  QWIIC_LOGO_4MM  [QWIIC_4MM]  9.47,50.11 0 top
LOGO22  OSHW-LOGOMINI  [OSHW-LOGO-MINI]  37.24,38.72 0 bottom
LOGO23  SFE_LOGO_NAME_FLAME.1_INCH  [SFE_LOGO_NAME_FLAME_.1]  45.47,54.18 0 bottom
LOGO24  QWIIC_LOGO_4MM  [QWIIC_4MM]  35.38,50.11 0 top
LOGO25  OSHW-LOGOMINI  [OSHW-LOGO-MINI]  63.14,38.72 0 bottom
LOGO26  SFE_LOGO_NAME_FLAME.1_INCH  [SFE_LOGO_NAME_FLAME_.1]  71.37,54.18 0 bottom
LOGO27  QWIIC_LOGO_4MM  [QWIIC_4MM]  61.29,50.11 0 top
LOGO28  OSHW-LOGOMINI  [OSHW-LOGO-MINI]  89.05,38.72 0 bottom
LOGO29  SFE_LOGO_NAME_FLAME.1_INCH  [SFE_LOGO_NAME_FLAME_.1]  97.28,54.18 0 bottom
LOGO30  QWIIC_LOGO_4MM  [QWIIC_4MM]  87.2,50.11 0 top
LOGO31  OSHW-LOGOMINI  [OSHW-LOGO-MINI]  114.96,38.72 0 bottom
LOGO32  SFE_LOGO_NAME_FLAME.1_INCH  [SFE_LOGO_NAME_FLAME_.1]  123.19,54.18 0 bottom
LOGO33  QWIIC_LOGO_4MM  [QWIIC_4MM]  113.11,50.11 0 top
LOGO34  OSHW-LOGOMINI  [OSHW-LOGO-MINI]  140.87,38.72 0 bottom
LOGO35  SFE_LOGO_NAME_FLAME.1_INCH  [SFE_LOGO_NAME_FLAME_.1]  149.1,54.18 0 bottom
LOGO36  QWIIC_LOGO_4MM  [QWIIC_4MM]  139.01,50.11 0 top
LOGO37  OSHW-LOGOMINI  [OSHW-LOGO-MINI]  11.33,64.62 0 bottom
LOGO38  SFE_LOGO_NAME_FLAME.1_INCH  [SFE_LOGO_NAME_FLAME_.1]  19.56,80.08 0 bottom
LOGO39  QWIIC_LOGO_4MM  [QWIIC_4MM]  9.47,76.02 0 top
LOGO40  OSHW-LOGOMINI  [OSHW-LOGO-MINI]  37.24,64.62 0 bottom
LOGO41  SFE_LOGO_NAME_FLAME.1_INCH  [SFE_LOGO_NAME_FLAME_.1]  45.47,80.08 0 bottom
LOGO42  QWIIC_LOGO_4MM  [QWIIC_4MM]  35.38,76.02 0 top
LOGO43  OSHW-LOGOMINI  [OSHW-LOGO-MINI]  63.14,64.62 0 bottom
LOGO44  SFE_LOGO_NAME_FLAME.1_INCH  [SFE_LOGO_NAME_FLAME_.1]  71.37,80.08 0 bottom
LOGO45  QWIIC_LOGO_4MM  [QWIIC_4MM]  61.29,76.02 0 top
LOGO46  OSHW-LOGOMINI  [OSHW-LOGO-MINI]  89.05,64.62 0 bottom
LOGO47  SFE_LOGO_NAME_FLAME.1_INCH  [SFE_LOGO_NAME_FLAME_.1]  97.28,80.08 0 bottom
LOGO48  QWIIC_LOGO_4MM  [QWIIC_4MM]  87.2,76.02 0 top
LOGO49  OSHW-LOGOMINI  [OSHW-LOGO-MINI]  114.96,64.62 0 bottom
LOGO50  SFE_LOGO_NAME_FLAME.1_INCH  [SFE_LOGO_NAME_FLAME_.1]  123.19,80.08 0 bottom
LOGO51  QWIIC_LOGO_4MM  [QWIIC_4MM]  113.11,76.02 0 top
LOGO52  OSHW-LOGOMINI  [OSHW-LOGO-MINI]  140.87,64.62 0 bottom
LOGO53  SFE_LOGO_NAME_FLAME.1_INCH  [SFE_LOGO_NAME_FLAME_.1]  149.1,80.08 0 bottom
LOGO54  QWIIC_LOGO_4MM  [QWIIC_4MM]  139.01,76.02 0 top
LOGO55  OSHW-LOGOMINI  [OSHW-LOGO-MINI]  11.33,90.53 0 bottom
LOGO56  SFE_LOGO_NAME_FLAME.1_INCH  [SFE_LOGO_NAME_FLAME_.1]  19.56,105.99 0 bottom
LOGO57  QWIIC_LOGO_4MM  [QWIIC_4MM]  9.47,101.93 0 top
LOGO58  OSHW-LOGOMINI  [OSHW-LOGO-MINI]  37.24,90.53 0 bottom
LOGO59  SFE_LOGO_NAME_FLAME.1_INCH  [SFE_LOGO_NAME_FLAME_.1]  45.47,105.99 0 bottom
LOGO60  QWIIC_LOGO_4MM  [QWIIC_4MM]  35.38,101.93 0 top
LOGO61  OSHW-LOGOMINI  [OSHW-LOGO-MINI]  63.14,90.53 0 bottom
LOGO62  SFE_LOGO_NAME_FLAME.1_INCH  [SFE_LOGO_NAME_FLAME_.1]  71.37,105.99 0 bottom
LOGO63  QWIIC_LOGO_4MM  [QWIIC_4MM]  61.29,101.93 0 top
LOGO64  OSHW-LOGOMINI  [OSHW-LOGO-MINI]  89.05,90.53 0 bottom
LOGO65  SFE_LOGO_NAME_FLAME.1_INCH  [SFE_LOGO_NAME_FLAME_.1]  97.28,105.99 0 bottom
LOGO66  QWIIC_LOGO_4MM  [QWIIC_4MM]  87.2,101.93 0 top
LOGO67  OSHW-LOGOMINI  [OSHW-LOGO-MINI]  114.96,90.53 0 bottom
LOGO68  SFE_LOGO_NAME_FLAME.1_INCH  [SFE_LOGO_NAME_FLAME_.1]  123.19,105.99 0 bottom
LOGO69  QWIIC_LOGO_4MM  [QWIIC_4MM]  113.11,101.93 0 top
LOGO70  OSHW-LOGOMINI  [OSHW-LOGO-MINI]  140.87,90.53 0 bottom
LOGO71  SFE_LOGO_NAME_FLAME.1_INCH  [SFE_LOGO_NAME_FLAME_.1]  149.1,105.99 0 bottom
LOGO72  QWIIC_LOGO_4MM  [QWIIC_4MM]  139.01,101.93 0 top
R1  2.2k  [0603]  17.02,24.64 90 top
R2  2.2k  [0603]  22.1,19.56 270 top
R3  10k  [0603]  15.37,19.56 270 top
R4  1k  [0603]  29.41,24.84 90 top
R5  2.2k  [0603]  42.93,24.64 90 top
R6  2.2k  [0603]  48.01,19.56 270 top
R7  56k  [0603]  22.1,24.64 270 top
R8  15k  [0603]  19.56,24.64 90 top
R9  1k  [0603]  55.32,24.84 90 top
R10  56k  [0603]  48.01,24.64 270 top
R11  15k  [0603]  45.47,24.64 90 top
R12  10k  [0603]  41.27,19.56 270 top
R13  2.2k  [0603]  68.83,24.64 90 top
R14  2.2k  [0603]  73.91,19.56 270 top
R15  1k  [0603]  81.23,24.84 90 top
R16  56k  [0603]  73.91,24.64 270 top
R17  15k  [0603]  71.37,24.64 90 top
R18  10k  [0603]  67.18,19.56 270 top
R19  2.2k  [0603]  94.74,24.64 90 top
R20  2.2k  [0603]  99.82,19.56 270 top
R21  1k  [0603]  107.14,24.84 90 top
R22  56k  [0603]  99.82,24.64 270 top
R23  15k  [0603]  97.28,24.64 90 top
R24  10k  [0603]  93.09,19.56 270 top
R25  2.2k  [0603]  120.65,24.64 90 top
R26  2.2k  [0603]  125.73,19.56 270 top
R27  1k  [0603]  133.05,24.84 90 top
R28  56k  [0603]  125.73,24.64 270 top
R29  15k  [0603]  123.19,24.64 90 top
R30  10k  [0603]  119,19.56 270 top
R31  2.2k  [0603]  146.56,24.64 90 top
R32  2.2k  [0603]  151.64,19.56 270 top
R33  1k  [0603]  158.95,24.84 90 top
R34  56k  [0603]  151.64,24.64 270 top
R35  15k  [0603]  149.1,24.64 90 top
R36  10k  [0603]  144.91,19.56 270 top
R37  2.2k  [0603]  17.02,50.55 90 top
R38  2.2k  [0603]  22.1,45.47 270 top
R39  1k  [0603]  29.41,50.75 90 top
R40  56k  [0603]  22.1,50.55 270 top
R41  15k  [0603]  19.56,50.55 90 top
R42  10k  [0603]  15.37,45.47 270 top
R43  2.2k  [0603]  42.93,50.55 90 top
R44  2.2k  [0603]  48.01,45.47 270 top
R45  1k  [0603]  55.32,50.75 90 top
R46  56k  [0603]  48.01,50.55 270 top
R47  15k  [0603]  45.47,50.55 90 top
R48  10k  [0603]  41.27,45.47 270 top
R49  2.2k  [0603]  68.83,50.55 90 top
R50  2.2k  [0603]  73.91,45.47 270 top
R51  1k  [0603]  81.23,50.75 90 top
R52  56k  [0603]  73.91,50.55 270 top
R53  15k  [0603]  71.37,50.55 90 top
R54  10k  [0603]  67.18,45.47 270 top
R55  2.2k  [0603]  94.74,50.55 90 top
R56  2.2k  [0603]  99.82,45.47 270 top
R57  1k  [0603]  107.14,50.75 90 top
R58  56k  [0603]  99.82,50.55 270 top
R59  15k  [0603]  97.28,50.55 90 top
R60  10k  [0603]  93.09,45.47 270 top
R61  2.2k  [0603]  120.65,50.55 90 top
R62  2.2k  [0603]  125.73,45.47 270 top
R63  1k  [0603]  133.05,50.75 90 top
R64  56k  [0603]  125.73,50.55 270 top
R65  15k  [0603]  123.19,50.55 90 top
R66  10k  [0603]  119,45.47 270 top
R67  2.2k  [0603]  146.56,50.55 90 top
R68  2.2k  [0603]  151.64,45.47 270 top
R69  1k  [0603]  158.95,50.75 90 top
R70  56k  [0603]  151.64,50.55 270 top
R71  15k  [0603]  149.1,50.55 90 top
R72  10k  [0603]  144.91,45.47 270 top
R73  2.2k  [0603]  17.02,76.45 90 top
R74  2.2k  [0603]  22.1,71.37 270 top
R75  1k  [0603]  29.41,76.66 90 top
R76  56k  [0603]  22.1,76.45 270 top
R77  15k  [0603]  19.56,76.45 90 top
R78  10k  [0603]  15.37,71.37 270 top
R79  2.2k  [0603]  42.93,76.45 90 top
R80  2.2k  [0603]  48.01,71.37 270 top
R81  1k  [0603]  55.32,76.66 90 top
R82  56k  [0603]  48.01,76.45 270 top
R83  15k  [0603]  45.47,76.45 90 top
R84  10k  [0603]  41.27,71.37 270 top
R85  2.2k  [0603]  68.83,76.45 90 top
R86  2.2k  [0603]  73.91,71.37 270 top
R87  1k  [0603]  81.23,76.66 90 top
R88  56k  [0603]  73.91,76.45 270 top
R89  15k  [0603]  71.37,76.45 90 top
R90  10k  [0603]  67.18,71.37 270 top
R91  2.2k  [0603]  94.74,76.45 90 top
R92  2.2k  [0603]  99.82,71.37 270 top
R93  1k  [0603]  107.14,76.66 90 top
R94  56k  [0603]  99.82,76.45 270 top
R95  15k  [0603]  97.28,76.45 90 top
R96  10k  [0603]  93.09,71.37 270 top
R97  2.2k  [0603]  120.65,76.45 90 top
R98  2.2k  [0603]  125.73,71.37 270 top
R99  1k  [0603]  133.05,76.66 90 top
R100  56k  [0603]  125.73,76.45 270 top
R101  15k  [0603]  123.19,76.45 90 top
R102  10k  [0603]  119,71.37 270 top
R103  2.2k  [0603]  146.56,76.45 90 top
R104  2.2k  [0603]  151.64,71.37 270 top
R105  1k  [0603]  158.95,76.66 90 top
R106  56k  [0603]  151.64,76.45 270 top
R107  15k  [0603]  149.1,76.45 90 top
R108  10k  [0603]  144.91,71.37 270 top
R109  2.2k  [0603]  17.02,102.36 90 top
R110  2.2k  [0603]  22.1,97.28 270 top
R111  1k  [0603]  29.41,102.57 90 top
R112  56k  [0603]  22.1,102.36 270 top
R113  15k  [0603]  19.56,102.36 90 top
R114  10k  [0603]  15.37,97.28 270 top
R115  2.2k  [0603]  42.93,102.36 90 top
R116  2.2k  [0603]  48.01,97.28 270 top
R117  1k  [0603]  55.32,102.57 90 top
R118  56k  [0603]  48.01,102.36 270 top
R119  15k  [0603]  45.47,102.36 90 top
R120  10k  [0603]  41.27,97.28 270 top
R121  2.2k  [0603]  68.83,102.36 90 top
R122  2.2k  [0603]  73.91,97.28 270 top
R123  1k  [0603]  81.23,102.57 90 top
R124  56k  [0603]  73.91,102.36 270 top
R125  15k  [0603]  71.37,102.36 90 top
R126  10k  [0603]  67.18,97.28 270 top
R127  2.2k  [0603]  94.74,102.36 90 top
R128  2.2k  [0603]  99.82,97.28 270 top
R129  1k  [0603]  107.14,102.57 90 top
R130  56k  [0603]  99.82,102.36 270 top
R131  15k  [0603]  97.28,102.36 90 top
R132  10k  [0603]  93.09,97.28 270 top
R133  2.2k  [0603]  120.65,102.36 90 top
R134  2.2k  [0603]  125.73,97.28 270 top
R135  1k  [0603]  133.05,102.57 90 top
R136  56k  [0603]  125.73,102.36 270 top
R137  15k  [0603]  123.19,102.36 90 top
R138  10k  [0603]  119,97.28 270 top
R139  2.2k  [0603]  146.56,102.36 90 top
R140  2.2k  [0603]  151.64,97.28 270 top
R141  1k  [0603]  158.95,102.57 90 top
R142  56k  [0603]  151.64,102.36 270 top
R143  15k  [0603]  149.1,102.36 90 top
R144  10k  [0603]  144.91,97.28 270 top
STANDOFF1  STAND-OFFTIGHT  [STAND-OFF-TIGHT]  9.4,29.72 0 top
STANDOFF2  STAND-OFFTIGHT  [STAND-OFF-TIGHT]  9.4,9.4 0 top
STANDOFF3  STAND-OFFTIGHT  [STAND-OFF-TIGHT]  29.72,9.4 0 top
STANDOFF4  STAND-OFFTIGHT  [STAND-OFF-TIGHT]  35.31,29.72 0 top
STANDOFF5  STAND-OFFTIGHT  [STAND-OFF-TIGHT]  29.72,29.72 0 top
STANDOFF6  STAND-OFFTIGHT  [STAND-OFF-TIGHT]  35.31,9.4 0 top
STANDOFF7  STAND-OFFTIGHT  [STAND-OFF-TIGHT]  55.63,29.72 0 top
STANDOFF8  STAND-OFFTIGHT  [STAND-OFF-TIGHT]  55.63,9.4 0 top
STANDOFF9  STAND-OFFTIGHT  [STAND-OFF-TIGHT]  61.21,29.72 0 top
STANDOFF10  STAND-OFFTIGHT  [STAND-OFF-TIGHT]  61.21,9.4 0 top
STANDOFF11  STAND-OFFTIGHT  [STAND-OFF-TIGHT]  81.53,29.72 0 top
STANDOFF12  STAND-OFFTIGHT  [STAND-OFF-TIGHT]  81.53,9.4 0 top
STANDOFF13  STAND-OFFTIGHT  [STAND-OFF-TIGHT]  87.12,29.72 0 top
STANDOFF14  STAND-OFFTIGHT  [STAND-OFF-TIGHT]  87.12,9.4 0 top
STANDOFF15  STAND-OFFTIGHT  [STAND-OFF-TIGHT]  107.44,29.72 0 top
STANDOFF16  STAND-OFFTIGHT  [STAND-OFF-TIGHT]  107.44,9.4 0 top
STANDOFF17  STAND-OFFTIGHT  [STAND-OFF-TIGHT]  113.03,29.72 0 top
STANDOFF18  STAND-OFFTIGHT  [STAND-OFF-TIGHT]  113.03,9.4 0 top
STANDOFF19  STAND-OFFTIGHT  [STAND-OFF-TIGHT]  133.35,29.72 0 top
STANDOFF20  STAND-OFFTIGHT  [STAND-OFF-TIGHT]  133.35,9.4 0 top
STANDOFF21  STAND-OFFTIGHT  [STAND-OFF-TIGHT]  138.94,29.72 0 top
STANDOFF22  STAND-OFFTIGHT  [STAND-OFF-TIGHT]  138.94,9.4 0 top
STANDOFF23  STAND-OFFTIGHT  [STAND-OFF-TIGHT]  159.26,29.72 0 top
STANDOFF24  STAND-OFFTIGHT  [STAND-OFF-TIGHT]  159.26,9.4 0 top
STANDOFF25  STAND-OFFTIGHT  [STAND-OFF-TIGHT]  9.4,55.63 0 top
STANDOFF26  STAND-OFFTIGHT  [STAND-OFF-TIGHT]  9.4,35.31 0 top
STANDOFF27  STAND-OFFTIGHT  [STAND-OFF-TIGHT]  29.72,55.63 0 top
STANDOFF28  STAND-OFFTIGHT  [STAND-OFF-TIGHT]  29.72,35.31 0 top
STANDOFF29  STAND-OFFTIGHT  [STAND-OFF-TIGHT]  35.31,55.63 0 top
STANDOFF30  STAND-OFFTIGHT  [STAND-OFF-TIGHT]  35.31,35.31 0 top
STANDOFF31  STAND-OFFTIGHT  [STAND-OFF-TIGHT]  55.63,55.63 0 top
STANDOFF32  STAND-OFFTIGHT  [STAND-OFF-TIGHT]  55.63,35.31 0 top
STANDOFF33  STAND-OFFTIGHT  [STAND-OFF-TIGHT]  61.21,55.63 0 top
STANDOFF34  STAND-OFFTIGHT  [STAND-OFF-TIGHT]  61.21,35.31 0 top
STANDOFF35  STAND-OFFTIGHT  [STAND-OFF-TIGHT]  81.53,55.63 0 top
STANDOFF36  STAND-OFFTIGHT  [STAND-OFF-TIGHT]  81.53,35.31 0 top
STANDOFF37  STAND-OFFTIGHT  [STAND-OFF-TIGHT]  87.12,55.63 0 top
STANDOFF38  STAND-OFFTIGHT  [STAND-OFF-TIGHT]  87.12,35.31 0 top
STANDOFF39  STAND-OFFTIGHT  [STAND-OFF-TIGHT]  107.44,55.63 0 top
STANDOFF40  STAND-OFFTIGHT  [STAND-OFF-TIGHT]  107.44,35.31 0 top
STANDOFF41  STAND-OFFTIGHT  [STAND-OFF-TIGHT]  113.03,55.63 0 top
STANDOFF42  STAND-OFFTIGHT  [STAND-OFF-TIGHT]  113.03,35.31 0 top
STANDOFF43  STAND-OFFTIGHT  [STAND-OFF-TIGHT]  133.35,55.63 0 top
STANDOFF44  STAND-OFFTIGHT  [STAND-OFF-TIGHT]  133.35,35.31 0 top
STANDOFF45  STAND-OFFTIGHT  [STAND-OFF-TIGHT]  138.94,55.63 0 top
STANDOFF46  STAND-OFFTIGHT  [STAND-OFF-TIGHT]  138.94,35.31 0 top
STANDOFF47  STAND-OFFTIGHT  [STAND-OFF-TIGHT]  159.26,55.63 0 top
STANDOFF48  STAND-OFFTIGHT  [STAND-OFF-TIGHT]  159.26,35.31 0 top
STANDOFF49  STAND-OFFTIGHT  [STAND-OFF-TIGHT]  9.4,81.53 0 top
STANDOFF50  STAND-OFFTIGHT  [STAND-OFF-TIGHT]  9.4,61.21 0 top
STANDOFF51  STAND-OFFTIGHT  [STAND-OFF-TIGHT]  29.72,81.53 0 top
STANDOFF52  STAND-OFFTIGHT  [STAND-OFF-TIGHT]  29.72,61.21 0 top
STANDOFF53  STAND-OFFTIGHT  [STAND-OFF-TIGHT]  35.31,81.53 0 top
STANDOFF54  STAND-OFFTIGHT  [STAND-OFF-TIGHT]  35.31,61.21 0 top
STANDOFF55  STAND-OFFTIGHT  [STAND-OFF-TIGHT]  55.63,81.53 0 top
STANDOFF56  STAND-OFFTIGHT  [STAND-OFF-TIGHT]  55.63,61.21 0 top
STANDOFF57  STAND-OFFTIGHT  [STAND-OFF-TIGHT]  61.21,81.53 0 top
STANDOFF58  STAND-OFFTIGHT  [STAND-OFF-TIGHT]  61.21,61.21 0 top
STANDOFF59  STAND-OFFTIGHT  [STAND-OFF-TIGHT]  81.53,81.53 0 top
STANDOFF60  STAND-OFFTIGHT  [STAND-OFF-TIGHT]  81.53,61.21 0 top
STANDOFF61  STAND-OFFTIGHT  [STAND-OFF-TIGHT]  87.12,81.53 0 top
STANDOFF62  STAND-OFFTIGHT  [STAND-OFF-TIGHT]  87.12,61.21 0 top
STANDOFF63  STAND-OFFTIGHT  [STAND-OFF-TIGHT]  107.44,81.53 0 top
STANDOFF64  STAND-OFFTIGHT  [STAND-OFF-TIGHT]  107.44,61.21 0 top
STANDOFF65  STAND-OFFTIGHT  [STAND-OFF-TIGHT]  113.03,81.53 0 top
STANDOFF66  STAND-OFFTIGHT  [STAND-OFF-TIGHT]  113.03,61.21 0 top
STANDOFF67  STAND-OFFTIGHT  [STAND-OFF-TIGHT]  133.35,81.53 0 top
STANDOFF68  STAND-OFFTIGHT  [STAND-OFF-TIGHT]  133.35,61.21 0 top
STANDOFF69  STAND-OFFTIGHT  [STAND-OFF-TIGHT]  138.94,81.53 0 top
STANDOFF70  STAND-OFFTIGHT  [STAND-OFF-TIGHT]  138.94,61.21 0 top
STANDOFF71  STAND-OFFTIGHT  [STAND-OFF-TIGHT]  159.26,81.53 0 top
STANDOFF72  STAND-OFFTIGHT  [STAND-OFF-TIGHT]  159.26,61.21 0 top
STANDOFF73  STAND-OFFTIGHT  [STAND-OFF-TIGHT]  9.4,107.44 0 top
STANDOFF74  STAND-OFFTIGHT  [STAND-OFF-TIGHT]  9.4,87.12 0 top
STANDOFF75  STAND-OFFTIGHT  [STAND-OFF-TIGHT]  29.72,107.44 0 top
STANDOFF76  STAND-OFFTIGHT  [STAND-OFF-TIGHT]  29.72,87.12 0 top
STANDOFF77  STAND-OFFTIGHT  [STAND-OFF-TIGHT]  35.31,107.44 0 top
STANDOFF78  STAND-OFFTIGHT  [STAND-OFF-TIGHT]  35.31,87.12 0 top
STANDOFF79  STAND-OFFTIGHT  [STAND-OFF-TIGHT]  55.63,107.44 0 top
STANDOFF80  STAND-OFFTIGHT  [STAND-OFF-TIGHT]  55.63,87.12 0 top
STANDOFF81  STAND-OFFTIGHT  [STAND-OFF-TIGHT]  61.21,107.44 0 top
STANDOFF82  STAND-OFFTIGHT  [STAND-OFF-TIGHT]  61.21,87.12 0 top
STANDOFF83  STAND-OFFTIGHT  [STAND-OFF-TIGHT]  81.53,107.44 0 top
STANDOFF84  STAND-OFFTIGHT  [STAND-OFF-TIGHT]  81.53,87.12 0 top
STANDOFF85  STAND-OFFTIGHT  [STAND-OFF-TIGHT]  87.12,107.44 0 top
STANDOFF86  STAND-OFFTIGHT  [STAND-OFF-TIGHT]  87.12,87.12 0 top
STANDOFF87  STAND-OFFTIGHT  [STAND-OFF-TIGHT]  107.44,107.44 0 top
STANDOFF88  STAND-OFFTIGHT  [STAND-OFF-TIGHT]  107.44,87.12 0 top
STANDOFF89  STAND-OFFTIGHT  [STAND-OFF-TIGHT]  113.03,107.44 0 top
STANDOFF90  STAND-OFFTIGHT  [STAND-OFF-TIGHT]  113.03,87.12 0 top
STANDOFF91  STAND-OFFTIGHT  [STAND-OFF-TIGHT]  133.35,107.44 0 top
STANDOFF92  STAND-OFFTIGHT  [STAND-OFF-TIGHT]  133.35,87.12 0 top
STANDOFF93  STAND-OFFTIGHT  [STAND-OFF-TIGHT]  138.94,107.44 0 top
STANDOFF94  STAND-OFFTIGHT  [STAND-OFF-TIGHT]  138.94,87.12 0 top
STANDOFF95  STAND-OFFTIGHT  [STAND-OFF-TIGHT]  159.26,107.44 0 top
STANDOFF96  STAND-OFFTIGHT  [STAND-OFF-TIGHT]  159.26,87.12 0 top
U1  STTS22H  [UDFN-6L]  45.47,19.56 0 top
U2  STTS22H  [UDFN-6L]  19.56,19.56 0 top
U3  STTS22H  [UDFN-6L]  71.37,19.56 0 top
U4  STTS22H  [UDFN-6L]  97.28,19.56 0 top
U5  STTS22H  [UDFN-6L]  123.19,19.56 0 top
U6  STTS22H  [UDFN-6L]  149.1,19.56 0 top
U7  STTS22H  [UDFN-6L]  19.56,45.47 0 top
U8  STTS22H  [UDFN-6L]  45.47,45.47 0 top
U9  STTS22H  [UDFN-6L]  71.37,45.47 0 top
U10  STTS22H  [UDFN-6L]  97.28,45.47 0 top
U11  STTS22H  [UDFN-6L]  123.19,45.47 0 top
U12  STTS22H  [UDFN-6L]  149.1,45.47 0 top
U13  STTS22H  [UDFN-6L]  19.56,71.37 0 top
U14  STTS22H  [UDFN-6L]  45.47,71.37 0 top
U15  STTS22H  [UDFN-6L]  71.37,71.37 0 top
U16  STTS22H  [UDFN-6L]  97.28,71.37 0 top
U17  STTS22H  [UDFN-6L]  123.19,71.37 0 top
U18  STTS22H  [UDFN-6L]  149.1,71.37 0 top
U19  STTS22H  [UDFN-6L]  19.56,97.28 0 top
U20  STTS22H  [UDFN-6L]  45.47,97.28 0 top
U21  STTS22H  [UDFN-6L]  71.37,97.28 0 top
U22  STTS22H  [UDFN-6L]  97.28,97.28 0 top
U23  STTS22H  [UDFN-6L]  123.19,97.28 0 top
U24  STTS22H  [UDFN-6L]  149.1,97.28 0 top
U$1  [#GND#3]  14.48,10.79 90 top
U$2  [#3V3#4]  17.02,10.67 90 top
U$3  [#SDA#5]  19.56,10.79 90 top
U$4  [#SCL#4]  22.1,10.67 90 top
U$5  [#SDA#7]  19.56,10.77 270 bottom
U$6  [#ADDR#6]  25.91,20.5 0 bottom
U$7  [#SCL#6]  22.1,10.62 270 bottom
U$8  [#ADDR1#9]  13.11,20.52 0 bottom
U$9  [#GND#3]  14.48,10.79 270 bottom
U$10  [#3V3#4]  17.02,10.67 270 bottom
U$11  [##INT##9]  24.64,10.54 270 bottom
U$12  [#0X3C#25]  22.56,22.2 0 bottom
U$13  [#0X3E#25]  29.31,22.2 0 bottom
U$14  [#0X3F#25]  16.41,22.15 0 bottom
U$15  [#0X38#25]  10.11,22.15 0 bottom
U$16  [#LED#11]  30.48,23.85 0 bottom
U$17  [TEMPERATURE23]  19.56,26.47 0 bottom
U$18  [##INT##6]  24.64,10.54 90 top
U$19  [SENSOR24]  23.47,24.82 0 bottom
U$20  [SFE_LOGO_FLAME_.1]  25.81,28.7 0 top
U$21  [PWR9]  28.07,24.89 90 top
U$22  [STTS22H21]  14.83,24.82 0 bottom
U$23  [TEMPERATURE23]  19.56,30.99 0 top
U$24  [SENSOR24]  19.56,29.41 0 top
U$25  [#I2C#11]  19.56,13.72 0 bottom
U$26  [STTS22H21]  19.51,27.64 0 top
U$27  [DEF_ADDR#29]  25.91,18.29 0 bottom
U$28  [0X3C30]  25.91,17.02 0 bottom
U$29  [#LED#11]  56.39,23.85 0 bottom
U$30  [#I2C#11]  45.47,13.72 0 bottom
U$31  [#GND#3]  40.39,10.79 90 top
U$32  [#3V3#4]  42.93,10.67 90 top
U$33  [#SDA#5]  45.47,10.79 90 top
U$34  [#SCL#4]  48.01,10.67 90 top
U$35  [#GND#3]  40.39,10.79 270 bottom
U$36  [#3V3#4]  42.93,10.67 270 bottom
U$37  [##INT##6]  50.55,10.54 90 top
U$38  [##INT##9]  50.55,10.54 270 bottom
U$39  [SFE_LOGO_FLAME_.1]  51.71,28.7 0 top
U$40  [PWR9]  53.97,24.89 90 top
U$41  [#ADDR#6]  51.82,20.5 0 bottom
U$42  [#SDA#7]  45.47,10.77 270 bottom
U$43  [#SCL#6]  48.01,10.62 270 bottom
U$44  [#ADDR1#9]  39.01,20.52 0 bottom
U$45  [#0X3C#25]  48.46,22.2 0 bottom
U$46  [#0X3E#25]  55.22,22.2 0 bottom
U$47  [#0X3F#25]  42.32,22.15 0 bottom
U$48  [#0X38#25]  36.02,22.15 0 bottom
U$49  [TEMPERATURE23]  45.47,26.47 0 bottom
U$50  [SENSOR24]  49.38,24.82 0 bottom
U$51  [STTS22H21]  40.74,24.82 0 bottom
U$52  [TEMPERATURE23]  45.47,30.99 0 top
U$53  [SENSOR24]  45.47,29.41 0 top
U$54  [STTS22H21]  45.42,27.64 0 top
U$55  [0X3C30]  51.82,17.02 0 bottom
U$56  [DEF_ADDR#29]  51.82,18.29 0 bottom
U$57  [#LED#11]  82.3,23.85 0 bottom
U$58  [#I2C#11]  71.37,13.72 0 bottom
U$59  [#GND#3]  66.29,10.79 90 top
U$60  [#3V3#4]  68.83,10.67 90 top
U$61  [#SDA#5]  71.37,10.79 90 top
U$62  [#SCL#4]  73.91,10.67 90 top
U$63  [#GND#3]  66.29,10.79 270 bottom
U$64  [#3V3#4]  68.83,10.67 270 bottom
U$65  [##INT##6]  76.45,10.54 90 top
U$66  [##INT##9]  76.45,10.54 270 bottom
U$67  [SFE_LOGO_FLAME_.1]  77.62,28.7 0 top
U$68  [PWR9]  79.88,24.89 90 top
U$69  [#ADDR#6]  77.72,20.5 0 bottom
U$70  [#SDA#7]  71.37,10.77 270 bottom
U$71  [#SCL#6]  73.91,10.62 270 bottom
U$72  [#ADDR1#9]  64.92,20.52 0 bottom
U$73  [#0X3C#25]  74.37,22.2 0 bottom
U$74  [#0X3E#25]  81.13,22.2 0 bottom
U$75  [#0X3F#25]  68.22,22.15 0 bottom
U$76  [#0X38#25]  61.93,22.15 0 bottom
U$77  [TEMPERATURE23]  71.37,26.47 0 bottom
U$78  [SENSOR24]  75.29,24.82 0 bottom
U$79  [STTS22H21]  66.65,24.82 0 bottom
U$80  [TEMPERATURE23]  71.37,30.99 0 top
U$81  [SENSOR24]  71.37,29.41 0 top
U$82  [STTS22H21]  71.32,27.64 0 top
U$83  [0X3C30]  77.72,17.02 0 bottom
U$84  [DEF_ADDR#29]  77.72,18.29 0 bottom
U$85  [#LED#11]  108.2,23.85 0 bottom
U$86  [#I2C#11]  97.28,13.72 0 bottom
U$87  [#GND#3]  92.2,10.79 90 top
U$88  [#3V3#4]  94.74,10.67 90 top
U$89  [#SDA#5]  97.28,10.79 90 top
U$90  [#SCL#4]  99.82,10.67 90 top
U$91  [#GND#3]  92.2,10.79 270 bottom
U$92  [#3V3#4]  94.74,10.67 270 bottom
U$93  [##INT##6]  102.36,10.54 90 top
U$94  [##INT##9]  102.36,10.54 270 bottom
U$95  [SFE_LOGO_FLAME_.1]  103.53,28.7 0 top
U$96  [PWR9]  105.79,24.89 90 top
U$97  [#ADDR#6]  103.63,20.5 0 bottom
U$98  [#SDA#7]  97.28,10.77 270 bottom
U$99  [#SCL#6]  99.82,10.62 270 bottom
U$100  [#ADDR1#9]  90.83,20.52 0 bottom
U$101  [#0X3C#25]  100.28,22.2 0 bottom
U$102  [#0X3E#25]  107.04,22.2 0 bottom
U$103  [#0X3F#25]  94.13,22.15 0 bottom
U$104  [#0X38#25]  87.83,22.15 0 bottom
U$105  [TEMPERATURE23]  97.28,26.47 0 bottom
U$106  [SENSOR24]  101.19,24.82 0 bottom
U$107  [STTS22H21]  92.56,24.82 0 bottom
U$108  [TEMPERATURE23]  97.28,30.99 0 top
U$109  [SENSOR24]  97.28,29.41 0 top
U$110  [STTS22H21]  97.23,27.64 0 top
U$111  [0X3C30]  103.63,17.02 0 bottom
U$112  [DEF_ADDR#29]  103.63,18.29 0 bottom
U$113  [#LED#11]  134.11,23.85 0 bottom
U$114  [#I2C#11]  123.19,13.72 0 bottom
U$115  [#GND#3]  118.11,10.79 90 top
U$116  [#3V3#4]  120.65,10.67 90 top
U$117  [#SDA#5]  123.19,10.79 90 top
U$118  [#SCL#4]  125.73,10.67 90 top
U$119  [#GND#3]  118.11,10.79 270 bottom
U$120  [#3V3#4]  120.65,10.67 270 bottom
U$121  [##INT##6]  128.27,10.54 90 top
U$122  [##INT##9]  128.27,10.54 270 bottom
U$123  [SFE_LOGO_FLAME_.1]  129.44,28.7 0 top
U$124  [PWR9]  131.7,24.89 90 top
U$125  [#ADDR#6]  129.54,20.5 0 bottom
U$126  [#SDA#7]  123.19,10.77 270 bottom
U$127  [#SCL#6]  125.73,10.62 270 bottom
U$128  [#ADDR1#9]  116.74,20.52 0 bottom
U$129  [#0X3C#25]  126.19,22.2 0 bottom
U$130  [#0X3E#25]  132.94,22.2 0 bottom
U$131  [#0X3F#25]  120.04,22.15 0 bottom
U$132  [#0X38#25]  113.74,22.15 0 bottom
U$133  [TEMPERATURE23]  123.19,26.47 0 bottom
U$134  [SENSOR24]  127.1,24.82 0 bottom
U$135  [STTS22H21]  118.47,24.82 0 bottom
U$136  [TEMPERATURE23]  123.19,30.99 0 top
U$137  [SENSOR24]  123.19,29.41 0 top
U$138  [STTS22H21]  123.14,27.64 0 top
U$139  [0X3C30]  129.54,17.02 0 bottom
U$140  [DEF_ADDR#29]  129.54,18.29 0 bottom
U$141  [#LED#11]  160.02,23.85 0 bottom
U$142  [#I2C#11]  149.1,13.72 0 bottom
U$143  [#GND#3]  144.02,10.79 90 top
U$144  [#3V3#4]  146.56,10.67 90 top
U$145  [#SDA#5]  149.1,10.79 90 top
U$146  [#SCL#4]  151.64,10.67 90 top
U$147  [#GND#3]  144.02,10.79 270 bottom
U$148  [#3V3#4]  146.56,10.67 270 bottom
U$149  [##INT##6]  154.18,10.54 90 top
U$150  [##INT##9]  154.18,10.54 270 bottom
U$151  [SFE_LOGO_FLAME_.1]  155.35,28.7 0 top
U$152  [PWR9]  157.61,24.89 90 top
U$153  [#ADDR#6]  155.45,20.5 0 bottom
U$154  [#SDA#7]  149.1,10.77 270 bottom
U$155  [#SCL#6]  151.64,10.62 270 bottom
U$156  [#ADDR1#9]  142.65,20.52 0 bottom
U$157  [#0X3C#25]  152.1,22.2 0 bottom
U$158  [#0X3E#25]  158.85,22.2 0 bottom
U$159  [#0X3F#25]  145.95,22.15 0 bottom
U$160  [#0X38#25]  139.65,22.15 0 bottom
U$161  [TEMPERATURE23]  149.1,26.47 0 bottom
U$162  [SENSOR24]  153.01,24.82 0 bottom
U$163  [STTS22H21]  144.37,24.82 0 bottom
U$164  [TEMPERATURE23]  149.1,30.99 0 top
U$165  [SENSOR24]  149.1,29.41 0 top
U$166  [STTS22H21]  149.05,27.64 0 top
U$167  [0X3C30]  155.45,17.02 0 bottom
U$168  [DEF_ADDR#29]  155.45,18.29 0 bottom
U$169  [#LED#11]  30.48,49.76 0 bottom
U$170  [#I2C#11]  19.56,39.62 0 bottom
U$171  [#GND#3]  14.48,36.7 90 top
U$172  [#3V3#4]  17.02,36.58 90 top
U$173  [#SDA#5]  19.56,36.7 90 top
U$174  [#SCL#4]  22.1,36.58 90 top
U$175  [#GND#3]  14.48,36.7 270 bottom
U$176  [#3V3#4]  17.02,36.58 270 bottom
U$177  [##INT##6]  24.64,36.45 90 top
U$178  [##INT##9]  24.64,36.45 270 bottom
U$179  [SFE_LOGO_FLAME_.1]  25.81,54.61 0 top
U$180  [PWR9]  28.07,50.8 90 top
U$181  [#ADDR#6]  25.91,46.41 0 bottom
U$182  [#SDA#7]  19.56,36.68 270 bottom
U$183  [#SCL#6]  22.1,36.53 270 bottom
U$184  [#ADDR1#9]  13.11,46.43 0 bottom
U$185  [#0X3C#25]  22.56,48.11 0 bottom
U$186  [#0X3E#25]  29.31,48.11 0 bottom
U$187  [#0X3F#25]  16.41,48.06 0 bottom
U$188  [#0X38#25]  10.11,48.06 0 bottom
U$189  [TEMPERATURE23]  19.56,52.37 0 bottom
U$190  [SENSOR24]  23.47,50.72 0 bottom
U$191  [STTS22H21]  14.83,50.72 0 bottom
U$192  [TEMPERATURE23]  19.56,56.9 0 top
U$193  [SENSOR24]  19.56,55.32 0 top
U$194  [STTS22H21]  19.51,53.54 0 top
U$195  [0X3C30]  25.91,42.93 0 bottom
U$196  [DEF_ADDR#29]  25.91,44.2 0 bottom
U$197  [#LED#11]  56.39,49.76 0 bottom
U$198  [#I2C#11]  45.47,39.62 0 bottom
U$199  [#GND#3]  40.39,36.7 90 top
U$200  [#3V3#4]  42.93,36.58 90 top
U$201  [#SDA#5]  45.47,36.7 90 top
U$202  [#SCL#4]  48.01,36.58 90 top
U$203  [#GND#3]  40.39,36.7 270 bottom
U$204  [#3V3#4]  42.93,36.58 270 bottom
U$205  [##INT##6]  50.55,36.45 90 top
U$206  [##INT##9]  50.55,36.45 270 bottom
U$207  [SFE_LOGO_FLAME_.1]  51.71,54.61 0 top
U$208  [PWR9]  53.97,50.8 90 top
U$209  [#ADDR#6]  51.82,46.41 0 bottom
U$210  [#SDA#7]  45.47,36.68 270 bottom
U$211  [#SCL#6]  48.01,36.53 270 bottom
U$212  [#ADDR1#9]  39.01,46.43 0 bottom
U$213  [#0X3C#25]  48.46,48.11 0 bottom
U$214  [#0X3E#25]  55.22,48.11 0 bottom
U$215  [#0X3F#25]  42.32,48.06 0 bottom
U$216  [#0X38#25]  36.02,48.06 0 bottom
U$217  [TEMPERATURE23]  45.47,52.37 0 bottom
U$218  [SENSOR24]  49.38,50.72 0 bottom
U$219  [STTS22H21]  40.74,50.72 0 bottom
U$220  [TEMPERATURE23]  45.47,56.9 0 top
U$221  [SENSOR24]  45.47,55.32 0 top
U$222  [STTS22H21]  45.42,53.54 0 top
U$223  [0X3C30]  51.82,42.93 0 bottom
U$224  [DEF_ADDR#29]  51.82,44.2 0 bottom
U$225  [#LED#11]  82.3,49.76 0 bottom
U$226  [#I2C#11]  71.37,39.62 0 bottom
U$227  [#GND#3]  66.29,36.7 90 top
U$228  [#3V3#4]  68.83,36.58 90 top
U$229  [#SDA#5]  71.37,36.7 90 top
U$230  [#SCL#4]  73.91,36.58 90 top
U$231  [#GND#3]  66.29,36.7 270 bottom
U$232  [#3V3#4]  68.83,36.58 270 bottom
U$233  [##INT##6]  76.45,36.45 90 top
U$234  [##INT##9]  76.45,36.45 270 bottom
U$235  [SFE_LOGO_FLAME_.1]  77.62,54.61 0 top
U$236  [PWR9]  79.88,50.8 90 top
U$237  [#ADDR#6]  77.72,46.41 0 bottom
U$238  [#SDA#7]  71.37,36.68 270 bottom
U$239  [#SCL#6]  73.91,36.53 270 bottom
U$240  [#ADDR1#9]  64.92,46.43 0 bottom
U$241  [#0X3C#25]  74.37,48.11 0 bottom
U$242  [#0X3E#25]  81.13,48.11 0 bottom
U$243  [#0X3F#25]  68.22,48.06 0 bottom
U$244  [#0X38#25]  61.93,48.06 0 bottom
U$245  [TEMPERATURE23]  71.37,52.37 0 bottom
U$246  [SENSOR24]  75.29,50.72 0 bottom
U$247  [STTS22H21]  66.65,50.72 0 bottom
U$248  [TEMPERATURE23]  71.37,56.9 0 top
U$249  [SENSOR24]  71.37,55.32 0 top
U$250  [STTS22H21]  71.32,53.54 0 top
U$251  [0X3C30]  77.72,42.93 0 bottom
U$252  [DEF_ADDR#29]  77.72,44.2 0 bottom
U$253  [#LED#11]  108.2,49.76 0 bottom
U$254  [#I2C#11]  97.28,39.62 0 bottom
U$255  [#GND#3]  92.2,36.7 90 top
U$256  [#3V3#4]  94.74,36.58 90 top
U$257  [#SDA#5]  97.28,36.7 90 top
U$258  [#SCL#4]  99.82,36.58 90 top
U$259  [#GND#3]  92.2,36.7 270 bottom
U$260  [#3V3#4]  94.74,36.58 270 bottom
U$261  [##INT##6]  102.36,36.45 90 top
U$262  [##INT##9]  102.36,36.45 270 bottom
U$263  [SFE_LOGO_FLAME_.1]  103.53,54.61 0 top
U$264  [PWR9]  105.79,50.8 90 top
U$265  [#ADDR#6]  103.63,46.41 0 bottom
U$266  [#SDA#7]  97.28,36.68 270 bottom
U$267  [#SCL#6]  99.82,36.53 270 bottom
U$268  [#ADDR1#9]  90.83,46.43 0 bottom
U$269  [#0X3C#25]  100.28,48.11 0 bottom
U$270  [#0X3E#25]  107.04,48.11 0 bottom
U$271  [#0X3F#25]  94.13,48.06 0 bottom
U$272  [#0X38#25]  87.83,48.06 0 bottom
U$273  [TEMPERATURE23]  97.28,52.37 0 bottom
U$274  [SENSOR24]  101.19,50.72 0 bottom
U$275  [STTS22H21]  92.56,50.72 0 bottom
U$276  [TEMPERATURE23]  97.28,56.9 0 top
U$277  [SENSOR24]  97.28,55.32 0 top
U$278  [STTS22H21]  97.23,53.54 0 top
U$279  [0X3C30]  103.63,42.93 0 bottom
U$280  [DEF_ADDR#29]  103.63,44.2 0 bottom
U$281  [#LED#11]  134.11,49.76 0 bottom
U$282  [#I2C#11]  123.19,39.62 0 bottom
U$283  [#GND#3]  118.11,36.7 90 top
U$284  [#3V3#4]  120.65,36.58 90 top
U$285  [#SDA#5]  123.19,36.7 90 top
U$286  [#SCL#4]  125.73,36.58 90 top
U$287  [#GND#3]  118.11,36.7 270 bottom
U$288  [#3V3#4]  120.65,36.58 270 bottom
U$289  [##INT##6]  128.27,36.45 90 top
U$290  [##INT##9]  128.27,36.45 270 bottom
U$291  [SFE_LOGO_FLAME_.1]  129.44,54.61 0 top
U$292  [PWR9]  131.7,50.8 90 top